# Altium PCB AX301_AX4010.PcbDoc (part 1 of 10)
Units mm, origin at the board's own origin, x right, y up, seen from the top; angles counter-clockwise.
Board outline 131.7 x 91.8 mm, 4 copper layers (Top Layer, GND, Mid-Layer 1, Bottom Layer); 191 components, 338 nets, 1108 pads, 420 vias.
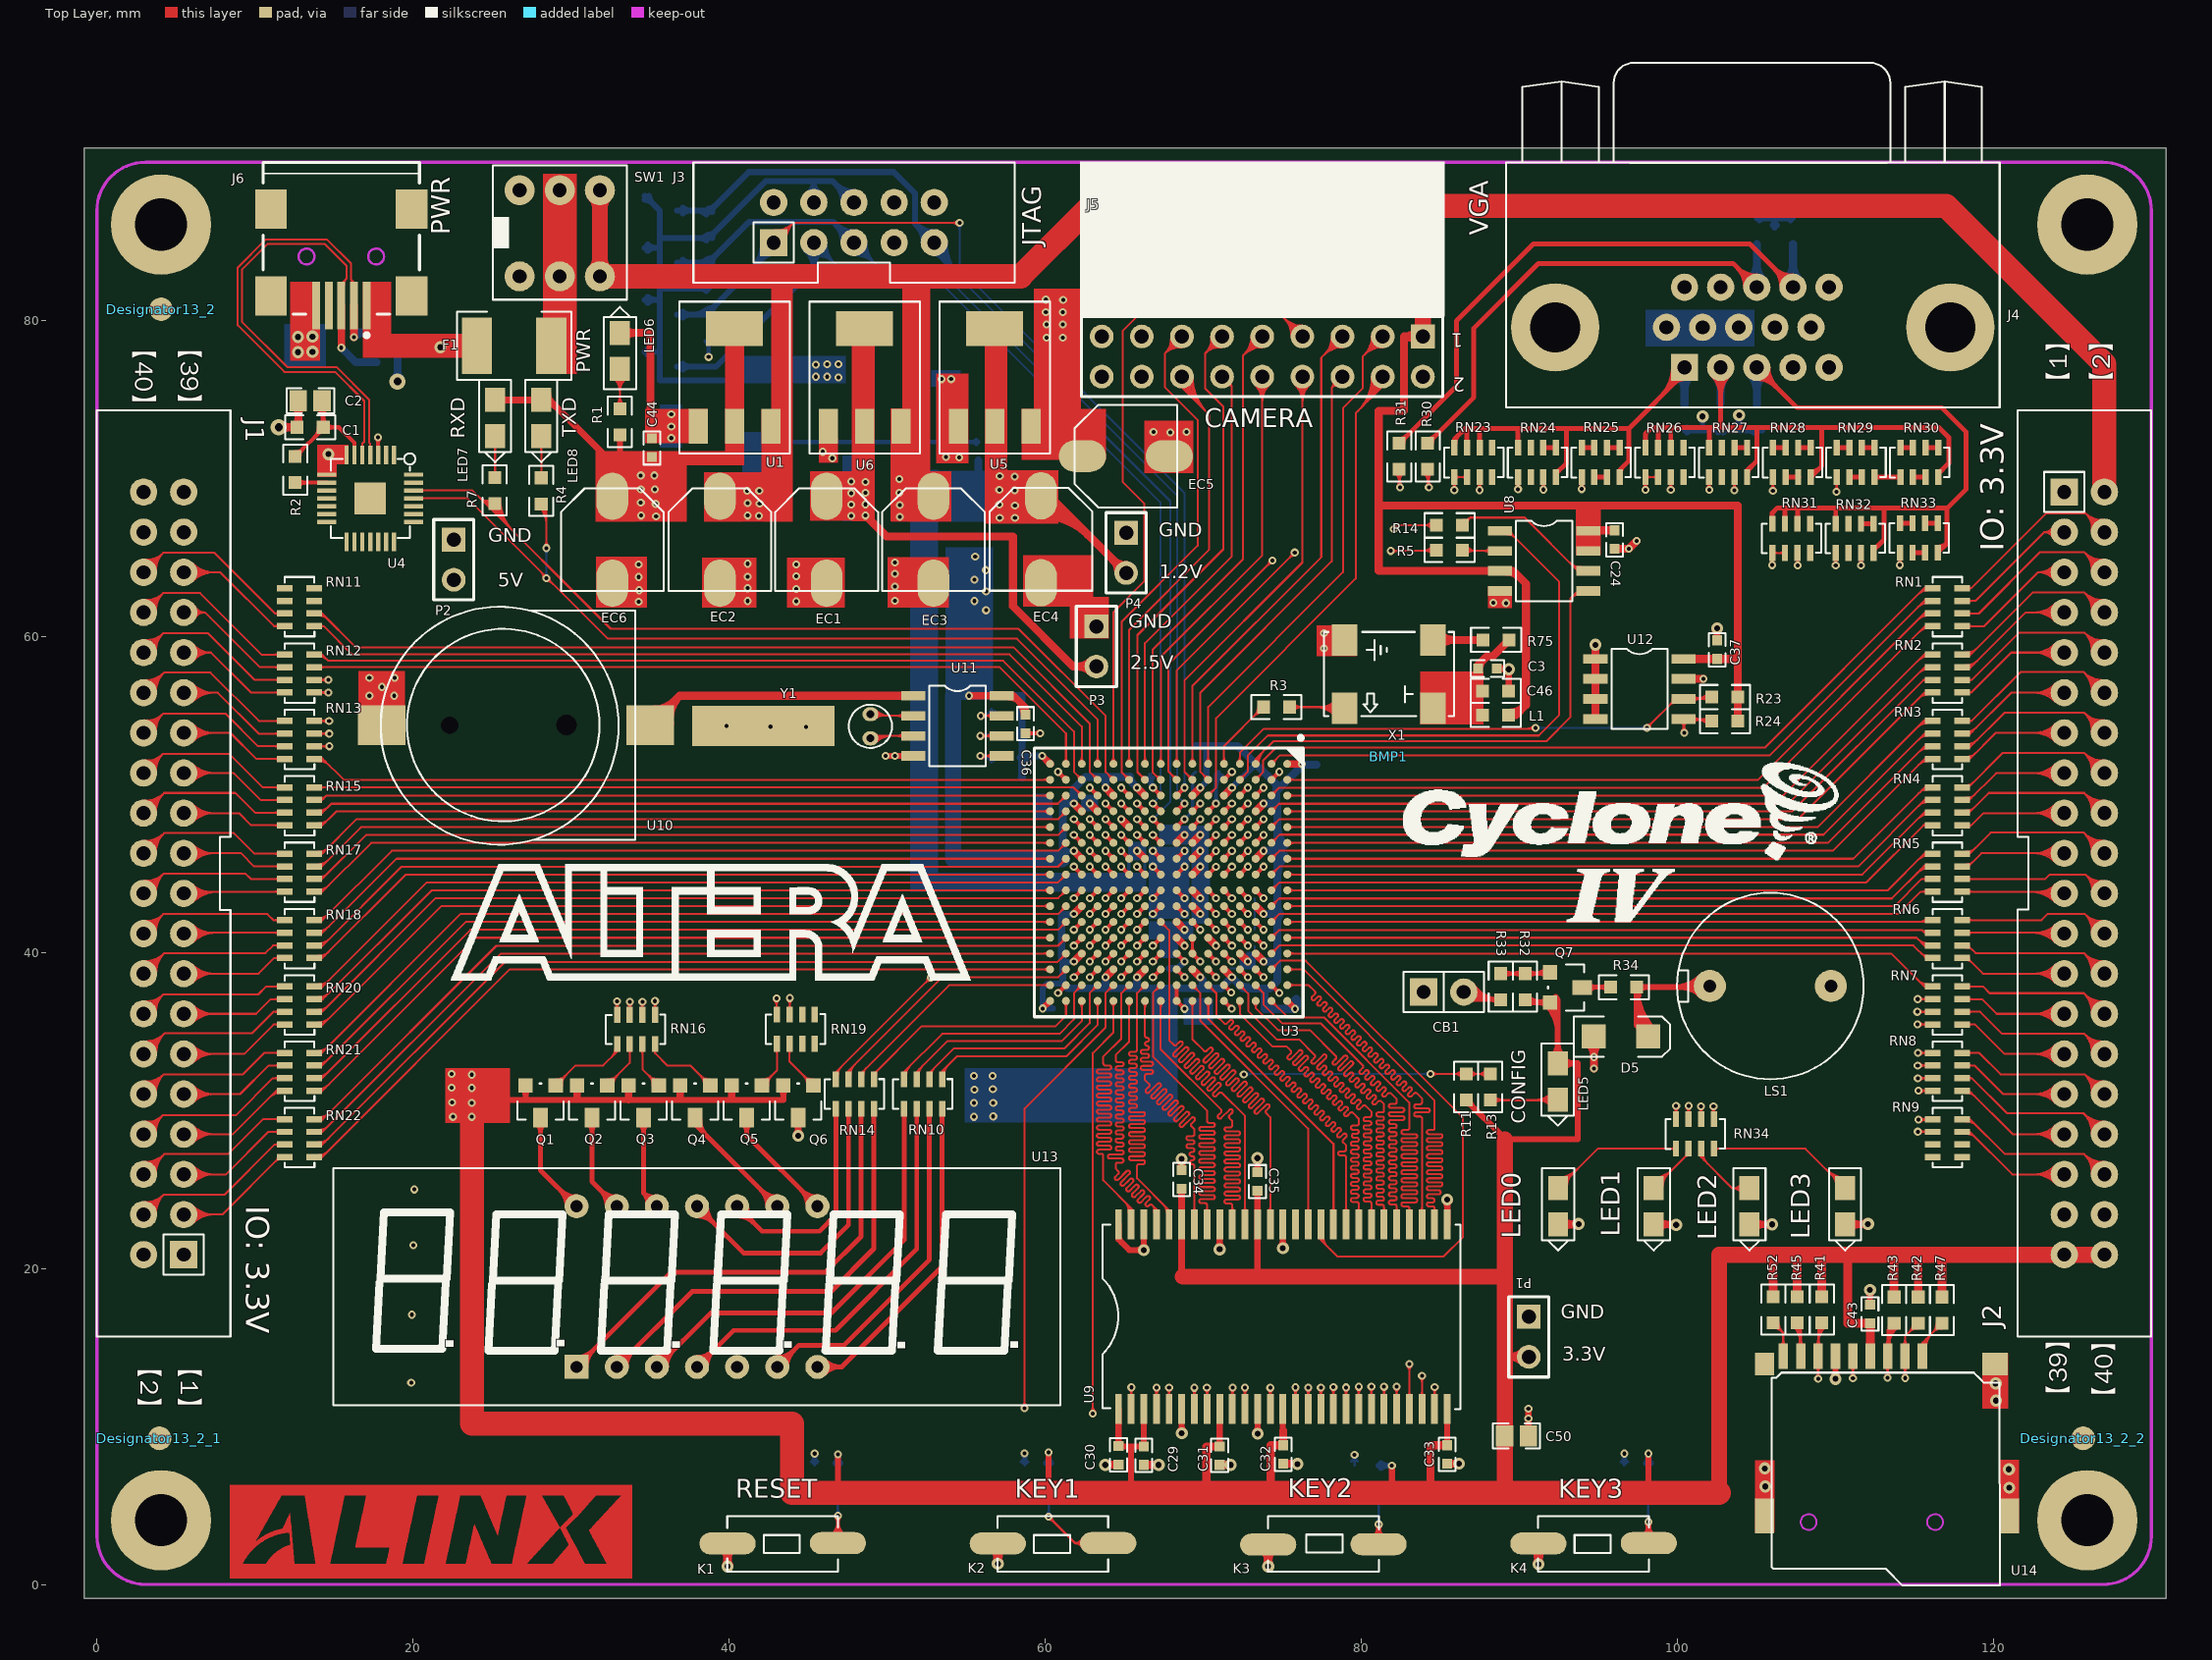
[diagram p0: Top Layer view]
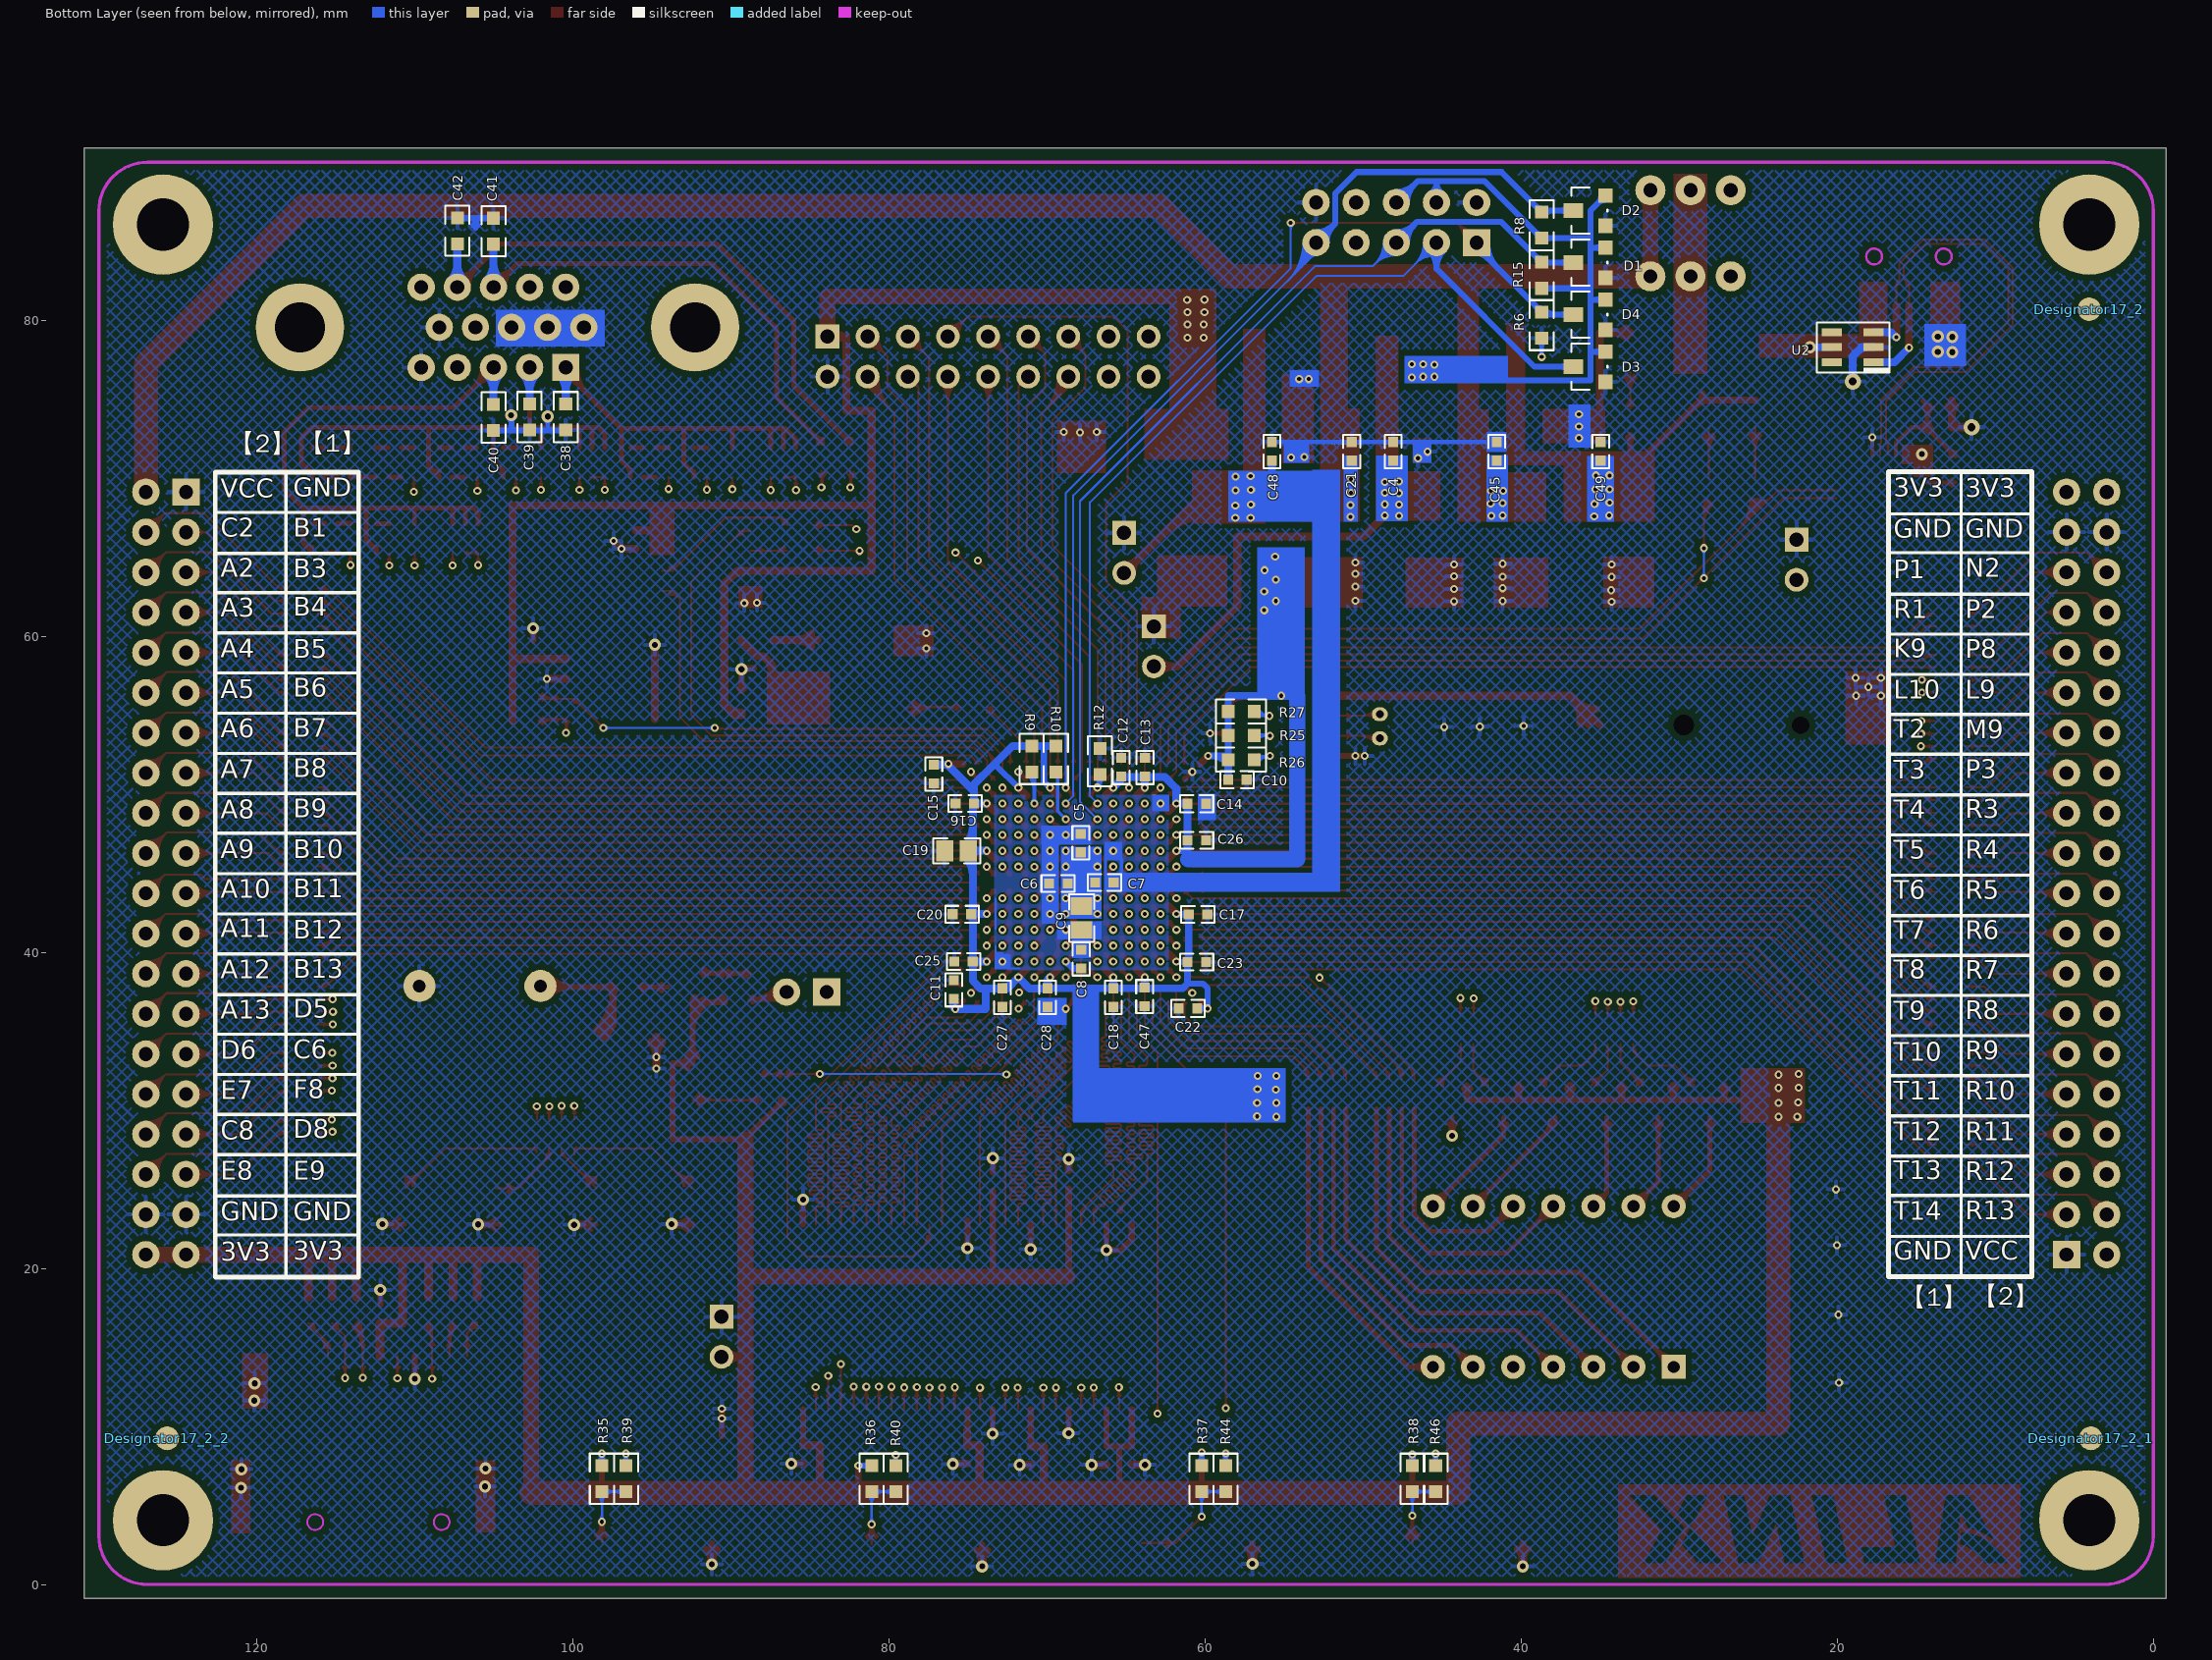
[diagram p1: Bottom Layer view, seen from below]
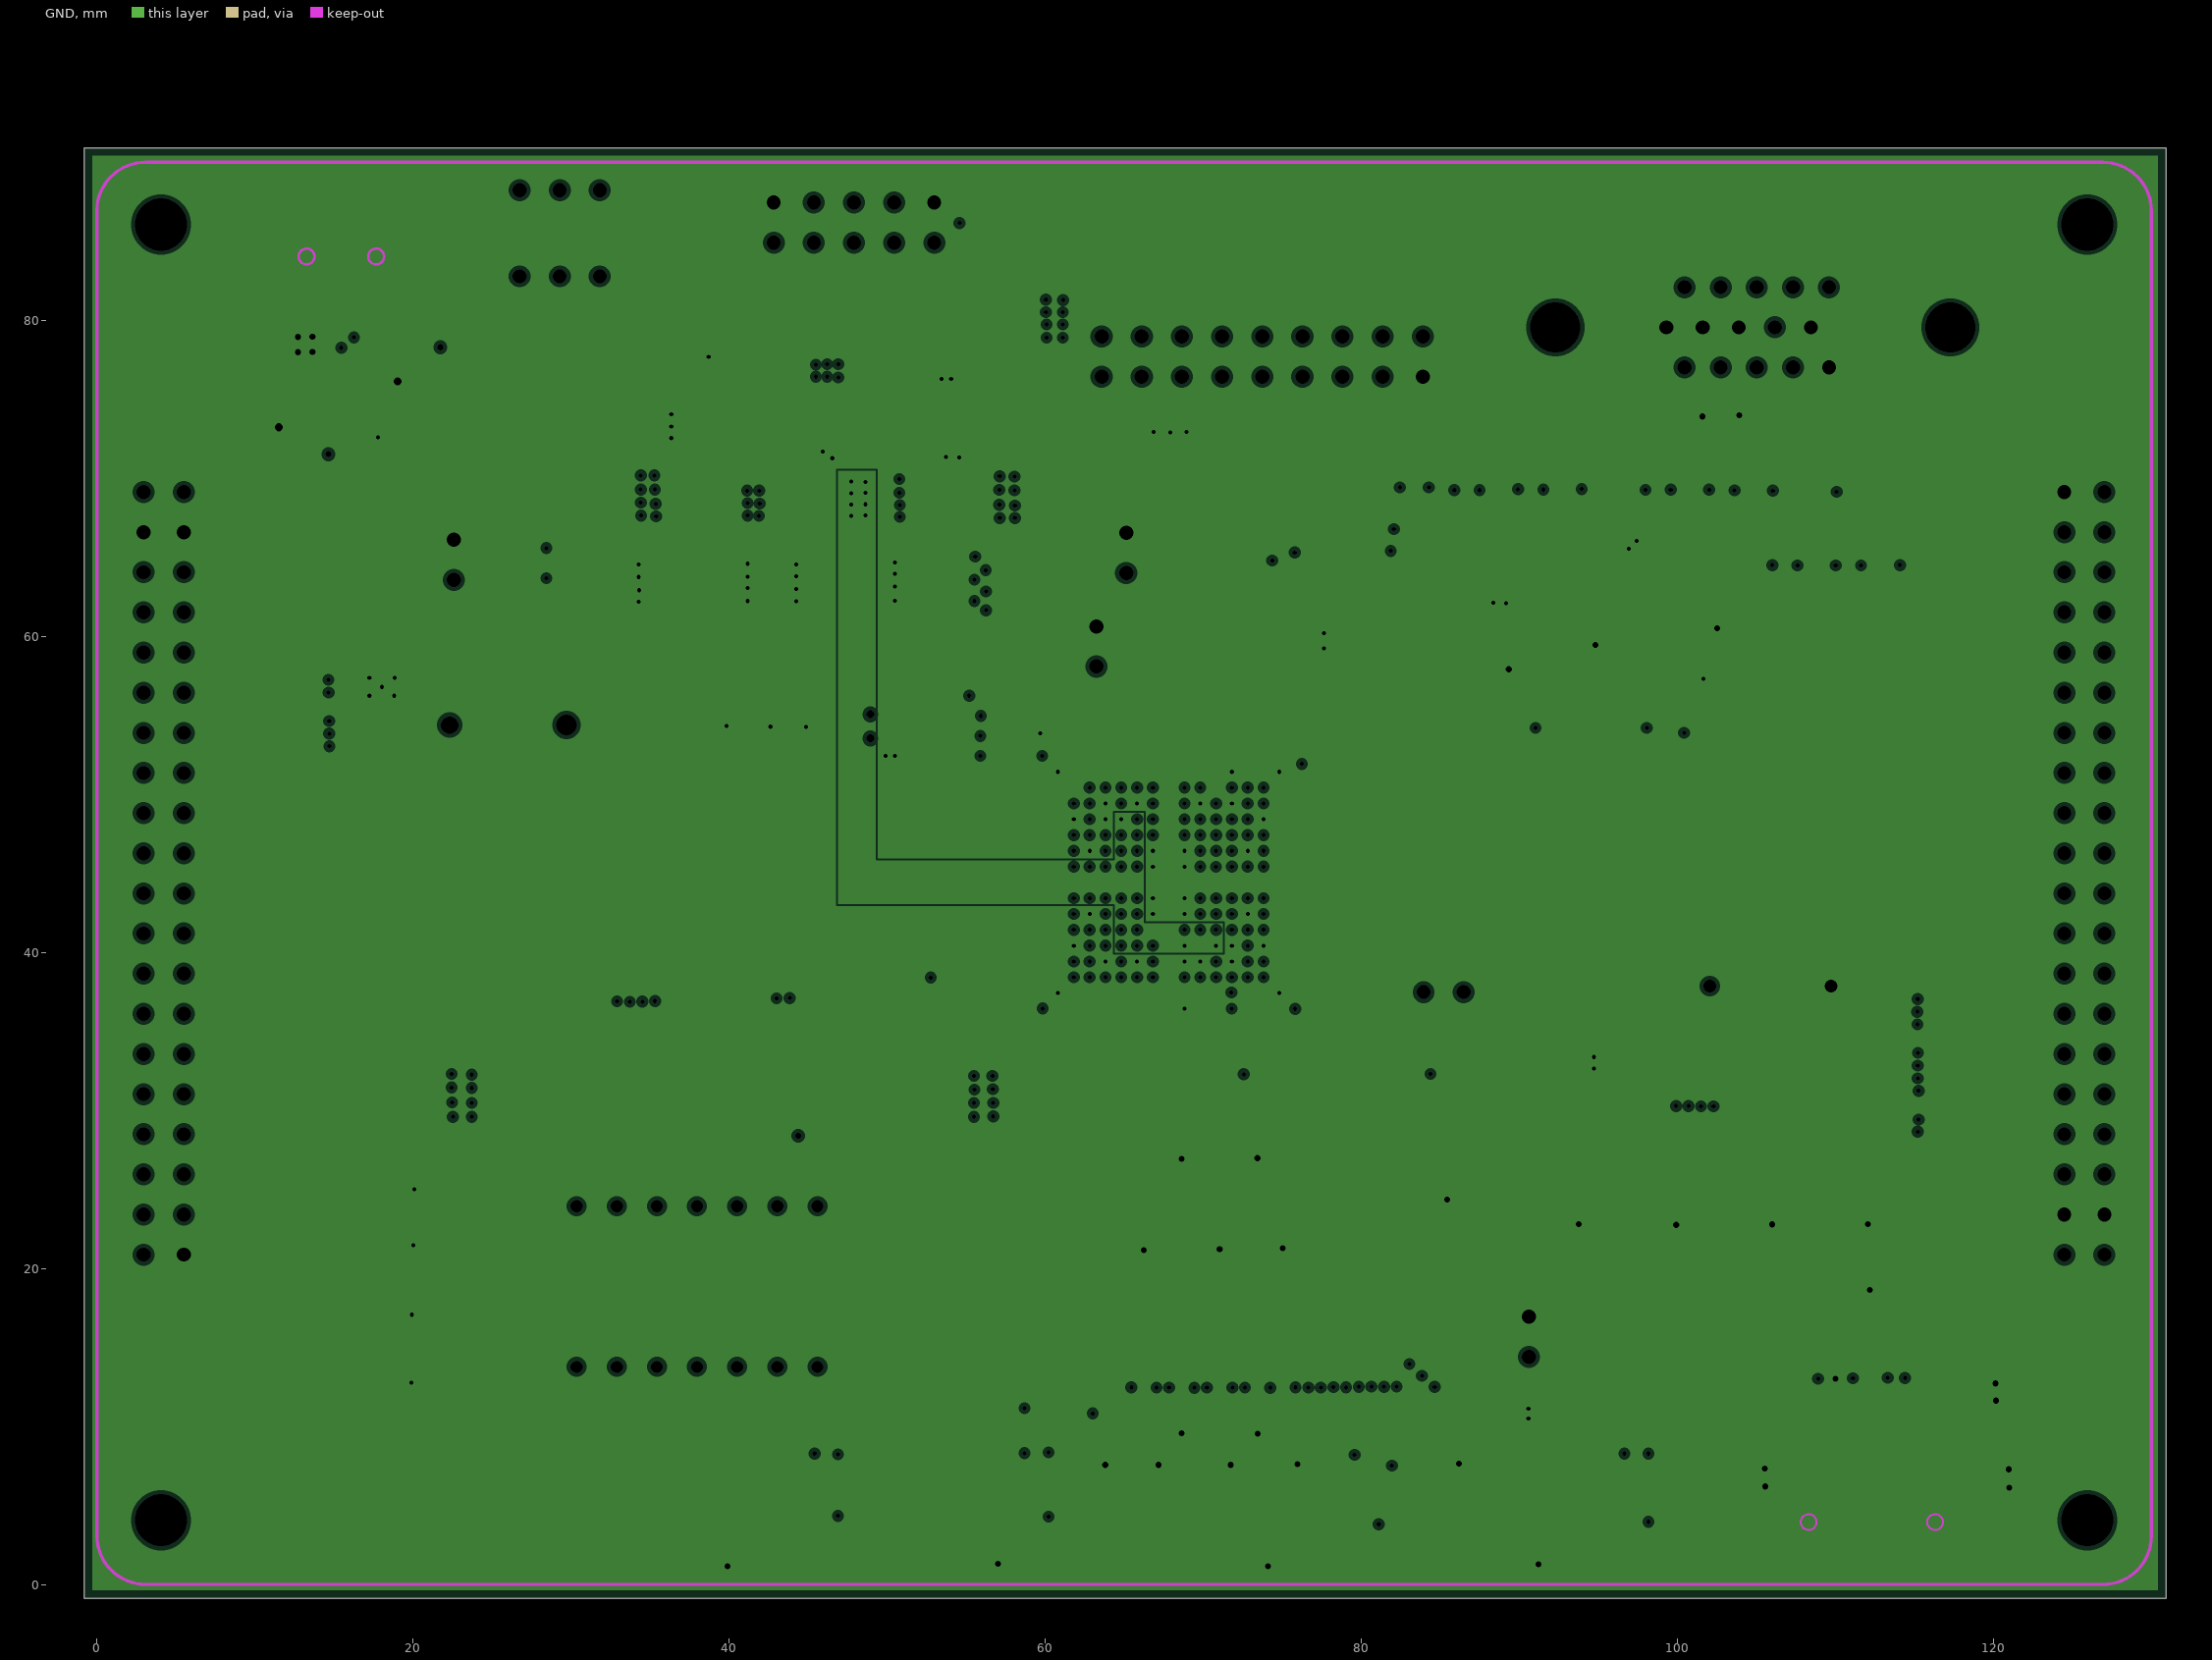
[diagram p2: GND, clearances drawn from the general rule]
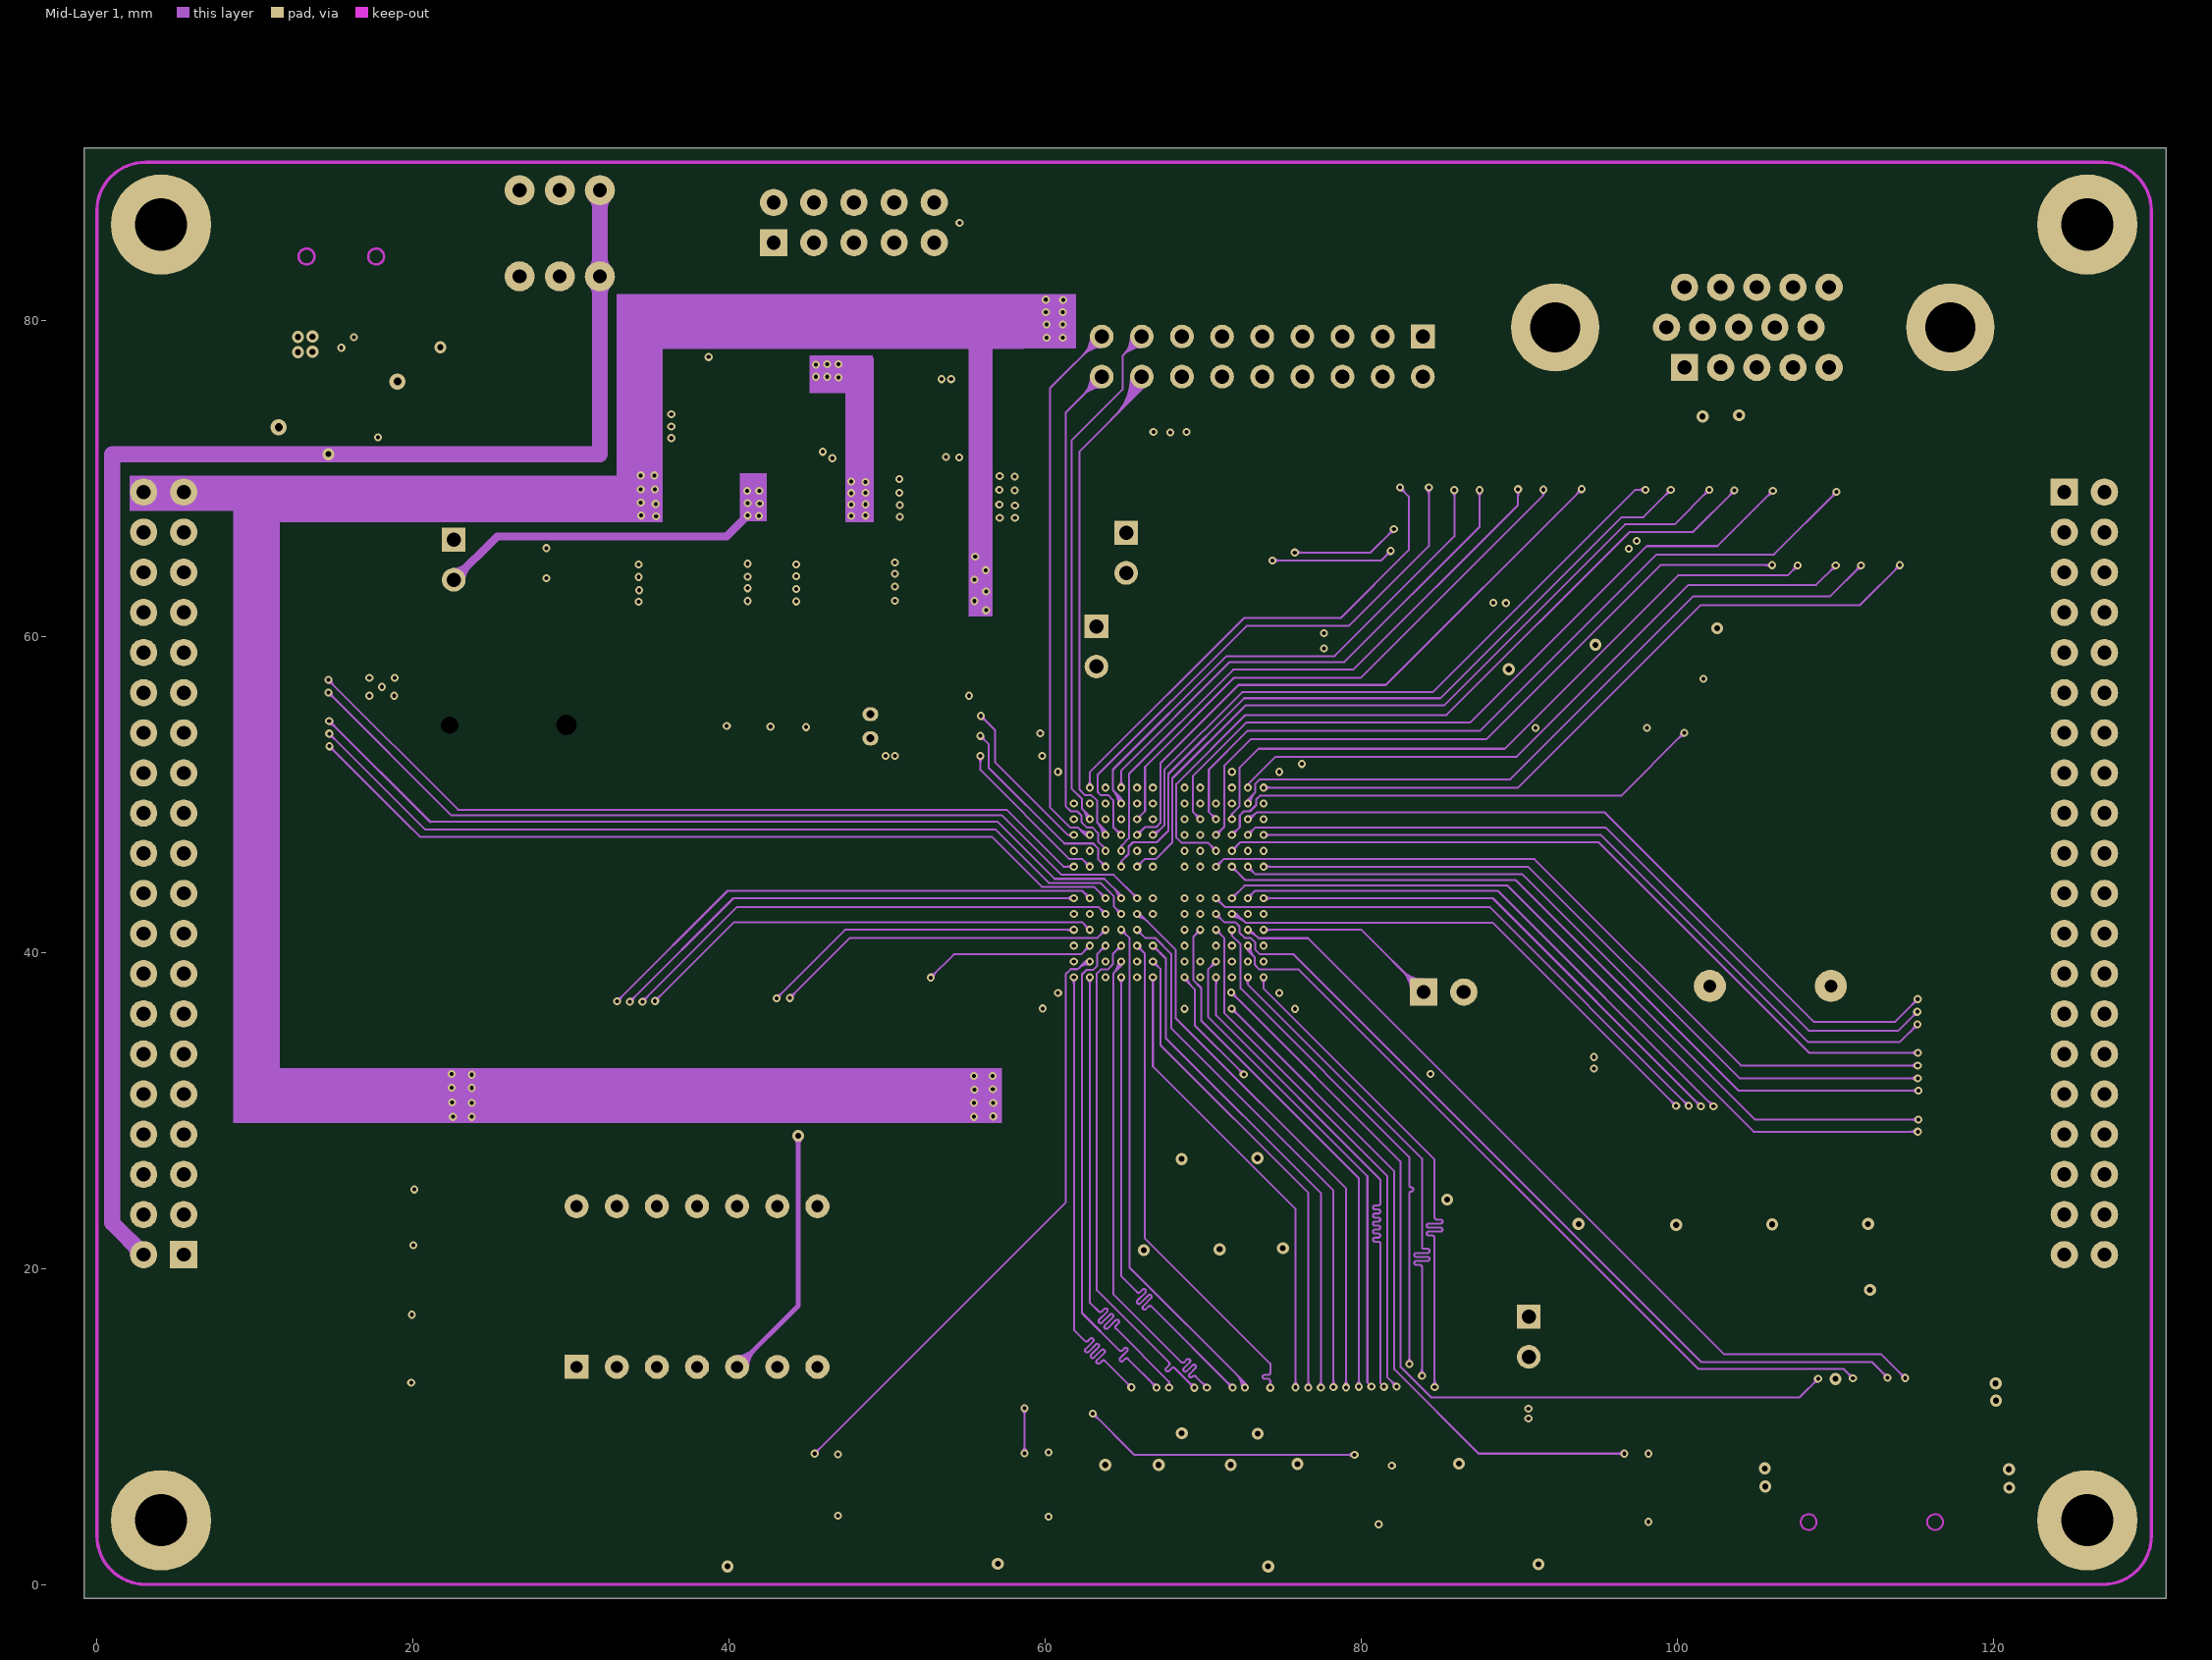
[diagram p3: Mid-Layer 1]

## Layer stack, top to bottom
Top Solder: solder mask 0.0102, Solder Resist, Dk 3.5
Top Layer: signal copper 0.0356
Dielectric1: core 0.32, FR-4, Dk 4.8
GND: plane copper 0.0356, net (Multiple Nets)
Dielectric3: prepreg 0.32, FR-4, Dk 4.8
Mid-Layer 1: signal copper 0.0356
Dielectric2: core 0.32, FR-4, Dk 4.8
Bottom Layer: signal copper 0.0356
Bottom Solder: solder mask 0.0102, Solder Resist, Dk 3.5

## Board outline
-0.787,90.914 130.912,90.914 130.912,82.354 130.912,-0.881 124.257,-0.881 -0.787,-0.881 -0.787,90.914

## Design rules (kind name [scope] priority, off if disabled: settings)
Clearance [All] p1: gap=0.127 ignorepadtopadclearanceinfootprint=FALSE except(0: Arc-Hole Track-Hole SMDPad-Hole THPad-Hole Via-Hole Fill-Hole Poly-Hole Region-Hole Text-Hole)
ComponentClearance [All] p1 off: gap=0.254 collisioncheckmode=3 verticalgap=0.254 showdistances=FALSE
FanoutControl [InNet('GND')] p1: bgadir=Out bgaviamode=Centered fanoutstyle=Auto fanoutdirection=Alternating viagrid=0.025
FanoutControl Fanout_BGA [IsBGA] p2: bgadir=Out bgaviamode=Centered fanoutstyle=Auto fanoutdirection=Alternating viagrid=0.025 // Fanout_BGA (Default Rule)
FanoutControl Fanout_LCC [IsLCC] p3: bgadir=Out bgaviamode=Centered fanoutstyle=Auto fanoutdirection=Alternating viagrid=0.025 // Fanout_LCC (Default Rule)
FanoutControl Fanout_SOIC [IsSOIC] p4: bgadir=Out bgaviamode=Centered fanoutstyle=Auto fanoutdirection=Alternating viagrid=0.025 // Fanout_SOIC (Default Rule)
FanoutControl Fanout_Small [(CompPinCount < 5)] p5: bgadir=Out bgaviamode=Centered fanoutstyle=Auto fanoutdirection=OutThenIn viagrid=0.025 // Fanout_Small (Default Rule)
FanoutControl Fanout_Default [All] p6: bgadir=Out bgaviamode=Centered fanoutstyle=Auto fanoutdirection=Alternating viagrid=0.025 // Fanout_Default (Default Rule)
HoleSize [All] p1: absolutevalues=TRUE maxlimit=5.08 minlimit=0.025 maxpercent=80.000 minpercent=20.000
HoleToHoleClearance [All] p1 off: gap=0.254 allowstackedmicrovias=TRUE
LayerPairs [All] p1 off: enforce=TRUE
MatchedLengths SDRAM_DB [InNetClass('S_DB[0..15]')] p1: tolerance=1.27 checknetsindiffpair=TRUE checkdiffpairvsdiffpair=FALSE checkxsignals=FALSE checkothers=FALSE
MatchedLengths SDRAM_A [InNetClass('S_A[0..12]')] p2: tolerance=1.27 checknetsindiffpair=TRUE checkdiffpairvsdiffpair=FALSE checkxsignals=FALSE checkothers=FALSE
MinimumSolderMaskSliver [All] p1 off: minsoldermaskwidth=0.254
NetAntennae [All] p1 off: netantennaetolerance=0
PlaneClearance [All] p1: clearance=0.254
PlaneConnect [All] p1: planeconnectstyle=Relief reliefexpansion=0.152 reliefentries=4 reliefconductorwidth=0.127 reliefairgap=0.152
PolygonConnect [All] p1: connectstyle=Relief reliefconductorwidth=0.254 reliefentries=4 polygonreliefangle="90 Angle" airgapwidth=0.254
RoutingVias [All] p1: holewidth=0.254 width=0.508 viastyle="Through Hole" minholewidth=0.254 minwidth=0.508 maxholewidth=1.27 maxwidth=2.54
SilkToSilkClearance [All] p1 off: silktosilkclearance=0.254
SilkToSolderMaskClearance SilkscreenOverComponentPads [IsPad] p1 off: minsilkscreentomaskgap=0.254 clearancetoexposedcopper=TRUE
SolderMaskExpansion [All] p1: expansion=0.102
Width D2V5 [InNet('D2V5')] p1: maxlimit=1.524 minlimit=0.203 preferedwidth=0.508
Width D1V2 [InNet('D1V2')] p2: maxlimit=1.524 minlimit=0.152 preferedwidth=0.508
Width D3V3 [InNet('D3V3')] p3: maxlimit=1.524 minlimit=0.152 preferedwidth=0.508
Width GND [InNet('GND')] p4 off: maxlimit=1.524 minlimit=0.254 preferedwidth=0.508
Width [All] p5 off: maxlimit=1.524 minlimit=0.127 preferedwidth=0.127
15 further rules are at their usual default settings.

## Classes and differential pairs
component class 2_FPGA: U3
net class VGAD[15..0]: VGAD0 VGAD1 VGAD2 VGAD3 VGAD4 VGAD5 VGAD6 VGAD7 VGAD8 VGAD9 VGAD10 VGAD11 VGAD12 VGAD13 VGAD14 VGAD15
net class SEL[0..5]: SEL0 SEL1 SEL2 SEL3 SEL4 SEL5
net class DIG[0..7]: DIG0 DIG1 DIG2 DIG3 DIG4 DIG5 DIG6 DIG7
component class 7_VGA: C38 C39 C40 C41 C42 C43 CB1 D5 J4 J5 K1 K2 K3 K4 LS1 Q7 R30 R31 R32 R33 R34 R35 R36 R37 R38 R39 R40 R41 R42 R43 R44 R45 R46 R47 R52 RN23 RN24 RN25 RN26 RN27 RN28 RN29 RN30 RN31 RN32 RN33 U14
component class 6_DIG: C36 C37 J2 LED0 LED1 LED2 LED3 Q1 Q2 Q3 Q4 Q5 Q6 R23 R24 R25 R26 R27 RN1 RN2 RN3 RN4 RN5 RN6 RN7 RN8 RN9 RN10 RN11 RN12 RN13 RN14 RN15 RN16 RN17 RN18 RN19 RN20 RN21 RN22 RN34 U10 U11 U12 U13 Y1
component class 4_FPGA: C3 C5 C6 C7 C8 C9 C10 C11 C12 C13 C14 C15 C16 C17 C18 C19 C20 C22 C23 C24 C25 C26 C27 C28 C46 C47 D1 D2 D3 D4 J3 L1 LED5 R3 R5 R6 R8 R9 R10 R11 R12 R13 R14 R15 R75 U8 X1
component class 5_SDRAM: C29 C30 C31 C32 C33 C34 C35 C50 U9
component class 1_POWER: C1 C2 C4 C21 C44 C45 C48 C49 EC1 EC2 EC3 EC4 EC5 EC6 F1 J6 LED6 LED7 LED8 P1 P2 P3 P4 R1 R2 R4 R7 SW1 U1 U2 U4 U5 U6
net class S_A[0..12]: S_A0 S_A1 S_A2 S_A3 S_A4 S_A5 S_A6 S_A7 S_A8 S_A9 S_A10 S_A11 S_A12
net class S_DB[0..15]: S_DB0 S_DB1 S_DB2 S_DB3 S_DB4 S_DB5 S_DB6 S_DB7 S_DB8 S_DB9 S_DB10 S_DB11 S_DB12 S_DB13 S_DB14 S_DB15

## Components (designator, comment, footprint, x,y, rotation, side; value= is the part's Value field where it differs from the comment)
BMP1 "" BMP1 81.712,52.375 r0 top
C1 "1uF" 0603 14.326,73.228 r180 top
C2 "10uF" 0805 14.249,74.905 r180 top
C3 "0.1uF" 0402 87.401,57.963 r0 top
C4 "104" 0402 48.108,71.12 r90 bottom
C5 "10uF" 0805 67.815,41.427 r90 bottom
C6 "104" 0402 65.786,44.425 r0 bottom
C7 "104" 0402 69.875,44.348 r180 bottom
C8 "104" 0402 67.843,40.157 r270 bottom
C9 "104" 0402 67.869,47.498 r270 bottom
C10 "104" 0402 58.547,50.927 r180 bottom
C11 "104" 0402 75.895,37.059 r90 bottom
C12 "104" 0402 65.303,51.13 r90 bottom
C13 "104" 0402 63.805,51.13 r90 bottom
C14 "104" 0402 61.112,49.403 r180 bottom
C15 "104" 0402 77.165,51.867 r270 bottom
C16 "104" 0402 74.625,49.428 r0 bottom
C17 "104" 0402 61.036,42.393 r180 bottom
C18 "104" 0402 65.811,37.719 r270 bottom
C19 "10uF" 0805 74.981,46.425 r0 bottom
C20 "104" 0402 74.803,42.41 r0 bottom
C21 "104" 0402 50.724,71.12 r90 bottom
C22 "104" 0402 60.503,36.449 r0 bottom
C23 "104" 0402 61.112,39.395 r180 bottom
C24 "104" 0402 96.037,65.532 r90 top
C25 "104" 0402 74.701,39.421 r0 bottom
C26 "104" 0402 61.112,47.092 r180 bottom
C27 "104" 0402 72.822,37.719 r270 bottom
C28 "104" 0402 69.977,37.719 r270 bottom
C29 "104" 0402 66.243,8.738 r270 top
C30 "104" 0402 64.643,8.763 r270 top
C31 "104" 0402 71.044,8.738 r270 top
C32 "104" 0402 75.057,8.814 r270 top
C33 "104" 0402 85.446,8.814 r270 top
C34 "104" 0402 68.631,25.044 r90 top
C35 "104" 0402 73.431,24.917 r90 top
C36 "104" 0402 58.75,55.042 r270 top
C37 "104" 0402 102.514,58.572 r90 top
C38 "5p1" 0603 100.457,74.701 r270 bottom
C39 "5p1" 0603 102.743,74.701 r270 bottom
C40 "5p1" 0603 105.029,74.676 r270 bottom
C41 "5p1" 0603 105.029,84.811 r90 bottom
C42 "5p1" 0603 107.315,84.836 r90 bottom
C43 "104" 0402 112.192,16.535 r90 top
C44 "104" 0402 35.128,71.349 r90 top
C45 "104" 0402 41.554,71.12 r90 bottom
C46 "4.7uF" 0603 87.681,56.54 r0 top
C47 "104" 0402 63.83,37.77 r270 bottom
C48 "104" 0402 55.778,71.12 r90 bottom
C49 "104" 0402 34.976,71.12 r90 bottom
C50 "10uF" 0805 89.078,9.398 r0 top
CB1 "BUZ" SIP2 83.947,37.49 r0 top
D1 "BAT54S" SOT23 34.671,82.685 r90 bottom
D2 "BAT54S" SOT23 34.671,85.979 r90 bottom
D3 "BAT54S" SOT23 34.671,76.098 r90 bottom
D4 "BAT54S" SOT23 34.671,79.392 r90 bottom
D5 "4148" 1206A 94.717,34.671 r0 top
Designator13_2 "Comment" TPS 4.064,80.696 r0 top
Designator13_2_1 "Comment" TPS 3.962,9.246 r0 top
Designator13_2_2 "Comment" TPS 125.679,9.246 r0 top
Designator17_2 "Comment" TPS 4.064,80.696 r180 bottom
Designator17_2_1 "Comment" TPS 3.962,9.246 r180 bottom
Designator17_2_2 "Comment" TPS 125.679,9.246 r180 bottom
EC1 "100uF/16V" AEC6.5 46.177,68.859 r270 top
EC2 "100uF/16V" AEC6.5 39.421,68.859 r270 top
EC3 "100uF/16V" AEC6.5 52.934,68.859 r270 top
EC4 "100uF/16V" AEC6.5 59.741,68.885 r270 top
EC5 "100uF/16V" AEC6.5 62.357,71.399 r0 top
EC6 "100uF/16V" AEC6.5 32.614,68.859 r270 top
F1 "Fuse" 1812 24.054,78.384 r0 top
J1 "IDC40" IDC-40J 4.225,45 r90 top (schematic designator J6)
J2 "IDC40" IDC-40J 125.755,45 r270 top
J3 "JTAG" JTAG-10 42.824,84.912 r0 top
J4 "VGA" VGA 100.457,77.013 r90 top
J5 "Header 9X2" HDR2X9 83.896,78.973 r180 top locked
J6 "EC2" MINIUSBB 15.469,80.932 r270 top (schematic designator J1)
K1 "RESET" KEY735SO 46.888,2.616 r180 top
K2 "KEY1" KEY735SO 63.991,2.616 r180 top
K3 "KEY2" KEY735SO 74.109,2.52 r0 top
K4 "KEY3" KEY735SO 98.196,2.616 r180 top
L1 "Bead" 0603 89.332,55.016 r180 top
LED0 "LED0" LEDSO 92.456,22.784 r90 top
LED1 "LED1" LEDso 98.51,22.784 r90 top
LED2 "LED2" LEDSO 104.563,22.784 r90 top
LED3 "LED3" LEDSO 110.617,22.784 r90 top
LED5 "CONFIG" LEDSO 92.431,30.683 r90 top
LED6 "D3V3" LEDSO 33.096,79.197 r270 top
LED7 "RXD" LEDSO 25.197,72.669 r90 top
LED8 "TXD" LEDSO 28.118,72.669 r90 top
LS1 "BUZZER" BUZZER 102.057,37.871 r0 top
P1 "3.3V" HDR1X2 90.602,16.942 r270 top
P2 "5V" HDR1X2 22.581,66.116 r270 top
P3 "3.3V" HDR1X2 63.246,60.63 r270 top
P4 "1.2V" HDR1X2 65.126,66.548 r270 top
Q1 "9012" SOT23 29.032,31.572 r180 top
Q2 "9012" SOT23 32.294,31.572 r180 top
Q3 "9012" SOT23 35.555,31.572 r180 top
Q4 "9012" SOT23 38.816,31.572 r180 top
Q5 "9012" SOT23 42.078,31.572 r180 top
Q6 "9012" SOT23 45.339,31.572 r180 top
Q7 "9012" SOT23 91.948,38.735 r270 top
R1 "1K" 0603 33.096,72.746 r90 top
R2 "10k" 0603 12.548,69.723 r90 top
R3 "33R" 0603 73.812,55.524 r0 top
R4 "1K" 0603 28.118,68.377 r90 top
R5 "49.9" 0603 84.76,65.456 r0 top
R6 "1K" 0603 38.71,78.867 r90 bottom
R7 "1K" 0603 25.171,68.402 r90 top
R8 "10K" 0603 38.71,85.192 r90 bottom
R9 "10K" 0603 70.968,53.061 r270 bottom
R10 "10K" 0603 69.444,53.061 r270 bottom
R11 "10K" 0603 86.639,30.658 r90 top
R12 "10K" 0603 66.65,51.257 r90 bottom
R13 "10K" 0603 88.163,32.309 r270 top
R14 "24.9" 0603 84.76,67.031 r0 top
R15 "10K" 0603 38.71,82.017 r90 bottom
R23 "4k7" 0603 103.835,56.159 r180 top
R24 "4k7" 0603 103.835,54.635 r180 top
R25 "10k" 0603 58.547,53.721 r180 bottom
R26 "10k" 0603 58.547,52.197 r180 bottom
R27 "10k" 0603 58.547,55.245 r180 bottom
R30 "22" 0603 84.201,72.212 r270 top
R31 "22" 0603 82.398,72.212 r270 top
R32 "1K" 0603 90.373,37.008 r90 top
R33 "2K2" 0603 88.824,37.008 r90 top
R34 "15" 0603 95.783,37.795 r0 top
R35 "10k" 0603 98.171,7.518 r270 bottom
R36 "10k" 0603 81.102,7.518 r270 bottom
R37 "10k" 0603 60.223,7.518 r270 bottom
R38 "10k" 0603 46.888,7.518 r270 bottom
R39 "100" 0603 96.647,7.518 r270 bottom
R40 "100" 0603 79.578,7.518 r270 bottom
R41 "1K" 0603 109.144,18.212 r270 top
R42 "1K" 0603 115.24,18.186 r270 top
R43 "1K" 0603 113.716,18.186 r270 top
R44 "100" 0603 58.699,7.518 r270 bottom
R45 "1K" 0603 107.594,18.212 r270 top
R46 "100" 0603 45.415,7.518 r270 bottom
R47 "1K" 0603 116.738,18.186 r270 top
R52 "1K" 0603 106.07,18.212 r270 top
R75 "10k" 0603 87.706,59.766 r0 top
RN1 "33R" RN-8P 116.154,63.043 r0 top
RN2 "33R" RN-8P 116.154,58.842 r0 top
RN3 "33R" RN-8P 116.154,54.642 r0 top
RN4 "33R" RN-8P 116.154,50.441 r0 top
RN5 "33R" RN-8P 116.154,46.241 r0 top
RN6 "33R" RN-8P 116.154,42.04 r0 top
RN7 "33R" RN-8P 116.154,37.84 r0 top
RN8 "33R" RN-8P 116.154,33.639 r0 top
RN9 "33R" RN-8P 116.154,29.439 r0 top
RN10 "470" RN-8P 51.079,30.099 r90 top
RN11 "33R" RN-8P 11.887,63.043 r0 top
RN12 "33R" RN-8P 11.887,58.842 r0 top
RN13 "33R" RN-8P 11.887,54.642 r0 top
RN14 "470" RN-8P 46.761,30.099 r90 top
RN15 "33R" RN-8P 11.887,50.441 r0 top
RN16 "470" RN-8P 32.918,34.188 r90 top
RN17 "33R" RN-8P 11.887,46.241 r0 top
RN18 "33R" RN-8P 11.887,42.04 r0 top
RN19 "470" RN-8P 43.028,34.214 r90 top
RN20 "33R" RN-8P 11.887,37.84 r0 top
RN21 "33R" RN-8P 11.887,33.639 r0 top
RN22 "33R" RN-8P 11.887,29.439 r0 top
RN23 "1K" RN-8P 88.29,71.933 r270 top
RN24 "2K" RN-8P 92.322,71.933 r270 top
RN25 "2K" RN-8P 96.353,71.933 r270 top
RN26 "1K" RN-8P 100.384,71.933 r270 top
RN27 "2K" RN-8P 104.416,71.933 r270 top
RN28 "2K" RN-8P 108.447,71.933 r270 top
RN29 "2K" RN-8P 112.478,71.933 r270 top
RN30 "2K" RN-8P 116.51,71.933 r270 top
RN31 "1K" RN-8P 108.407,67.132 r270 top
RN32 "2K" RN-8P 112.42,67.132 r270 top
RN33 "2K" RN-8P 116.484,67.158 r270 top
RN34 "470" RN-8P 102.311,29.439 r270 top
SW1 "SW" KEY_DPDT 26.746,82.779 r90 top
U1 "1117-3.3" SOT223 38.049,73.279 r0 top
U2 "SRV05-4" SOT23-6 17.704,77.343 r90 bottom
U3 "EP4CE6F17C8" FBGA256 67.818,44.425 r270 top locked
U4 "CP2102" QFN28 18.796,71.476 r270 top
U5 "1117-1.2" SOT223 54.508,73.279 r0 top
U6 "1117-2.5" SOT223 46.279,73.279 r0 top
U8 "M25P16-VMN3PB" SO8 88.773,66.675 r0 top
U9 "HY57V2562GTR" TSOP-54 64.643,11.1 r180 top
U10 "battery" BATSO 36.017,54.381 r0 top
U11 "DS1302" SO8 51.664,56.236 r0 top
U12 "24LC04" SO8 94.818,58.572 r0 top
U13 "HEX6" NIX_6 30.353,13.767 r0 top locked
U14 "SD" TF 113.259,9.398 r90 top locked
X1 "50M" CY_4 84.531,55.448 r0 top
Y1 "32.768kHz" CY_SMALL 48.946,55.067 r270 top

## Footprints (in the part's own frame and the unit in brackets; to place one, negate y for a bottom-side part, rotate by r counter-clockwise, add the part's x,y. Pads: shape width x height; smd on the part's side, far side on the other; paste and mask are expansions set on the pad)
0402 [mm]
  rect 0.635x0.635 smd: 1(0,0) 2(1.175,0)
  silkscreen extent -0.48,-0.53 1.63,0.53, body extent -0.42,-0.42 1.59,0.42, height 4.57
0603 [mil]
  rect 32x32 smd: 1(0,0) 2(65,0)
  silkscreen extent -30,-30 95,30, body extent -20,-20 85,20, height 180
0805 [mm]
  rect 1.1x1.36 smd: 1(0,0) 2(1.5,0)
  silkscreen extent -0.76,-0.79 2.24,0.79
1206A [mil]
  rect 60x60 smd: 1(0,0) 2(135,0)
  silkscreen extent -50,-50 190,50
1812 [mil]
  rect 75x140 smd: 1(0,0) 2(185,0)
  silkscreen extent -50,-85 235,85
AEC6.5 [mm]
  oval 3x2 smd: 1(0,0) 2(5.5,0)
  silkscreen extent -0.5,-3.25 6,3.25
BATSO [mm]
  round 1 hole 1.1: 0(-13.7,0)
  round 1 hole 1.3: 0(-6.3,0)
  rect 3x2.5 smd: 1(-1,0) 2(-18,0)
  silkscreen extent -18.06,-7.57 -1.95,7.48, body extent -18.12,-7.63 -1.89,7.55, height 4.57
BMP1 [mm]
  silkscreen extent 0.97,-10.41 28.5,-0.36
BUZZER [mil]
  round 80 hole 32: 1(0,0) 2(301.57,0)
  silkscreen extent -81,-232 383,232, body extent -82,-232 383,232, height 394
CY_4 [mm]
  rect 1.6x2 smd: 1(0,4.318) 2(-5.588,4.318) 3(-5.588,0) 4(0,0)
  silkscreen extent -6.88,-0.51 1.35,4.83
CY_SMALL [mil]
  rect 100x354.33 smd: 0(29,-267)
  oval 35x40 hole 20: 1(0,0) 2(60,0)
  silkscreen extent -24,-54 84,54, body extent -26,-56 86,56, height 180
FBGA256 [mm] "BGA, 256-Leads, Body 17x17mm, Pitch 1mm"
  round 0.5 smd: A1(-7.5,7.5) A2(-6.5,7.5) A3(-5.5,7.5) A4(-4.5,7.5) A5(-3.5,7.5) A6(-2.5,7.5) A7(-1.5,7.5) A8(-0.5,7.5) A9(0.5,7.5) A10(1.5,7.5) A11(2.5,7.5) A12(3.5,7.5) A13(4.5,7.5) A14(5.5,7.5) A15(6.5,7.5) A16(7.5,7.5) B1(-7.5,6.5) B2(-6.5,6.5) B3(-5.5,6.5) B4(-4.5,6.5) B5(-3.5,6.5) B6(-2.5,6.5) B7(-1.5,6.5) B8(-0.5,6.5) B9(0.5,6.5) B10(1.5,6.5) B11(2.5,6.5) B12(3.5,6.5) B13(4.5,6.5) B14(5.5,6.5) B15(6.5,6.5) B16(7.5,6.5) C1(-7.5,5.5) C2(-6.5,5.5) C3(-5.5,5.5) C4(-4.5,5.5) C5(-3.5,5.5) C6(-2.5,5.5) C7(-1.5,5.5) C8(-0.5,5.5) C9(0.5,5.5) C10(1.5,5.5) C11(2.5,5.5) C12(3.5,5.5) C13(4.5,5.5) C14(5.5,5.5) C15(6.5,5.5) C16(7.5,5.5) D1(-7.5,4.5) D2(-6.5,4.5) D3(-5.5,4.5) D4(-4.5,4.5) D5(-3.5,4.5) D6(-2.5,4.5) D7(-1.5,4.5) D8(-0.5,4.5) D9(0.5,4.5) D10(1.5,4.5) D11(2.5,4.5) D12(3.5,4.5) D13(4.5,4.5) D14(5.5,4.5) D15(6.5,4.5) D16(7.5,4.5) E1(-7.5,3.5) E2(-6.5,3.5) E3(-5.5,3.5) E4(-4.5,3.5) E5(-3.5,3.5) E6(-2.5,3.5) E7(-1.5,3.5) E8(-0.5,3.5) E9(0.5,3.5) E10(1.5,3.5) E11(2.5,3.5) E12(3.5,3.5) E13(4.5,3.5) E14(5.5,3.5) E15(6.5,3.5) E16(7.5,3.5) F1(-7.5,2.5) F2(-6.5,2.5) F3(-5.5,2.5) F4(-4.5,2.5) F5(-3.5,2.5) F6(-2.5,2.5) F7(-1.5,2.5) F8(-0.5,2.5) F9(0.5,2.5) F10(1.5,2.5) F11(2.5,2.5) F12(3.5,2.5) F13(4.5,2.5) F14(5.5,2.5) F15(6.5,2.5) F16(7.5,2.5) G1(-7.5,1.5) G2(-6.5,1.5) G3(-5.5,1.5) G4(-4.5,1.5) G5(-3.5,1.5) G6(-2.5,1.5) G7(-1.5,1.5) G8(-0.5,1.5) G9(0.5,1.5) G10(1.5,1.5) G11(2.5,1.5) G12(3.5,1.5) G13(4.5,1.5) G14(5.5,1.5) G15(6.5,1.5) G16(7.5,1.5) H1(-7.5,0.5) H2(-6.5,0.5) H3(-5.5,0.5) H4(-4.5,0.5) H5(-3.5,0.5) H6(-2.5,0.5) H7(-1.5,0.5) H8(-0.5,0.5) H9(0.5,0.5) H10(1.5,0.5) H11(2.5,0.5) H12(3.5,0.5) H13(4.5,0.5) H14(5.5,0.5) H15(6.5,0.5) H16(7.5,0.5) J1(-7.5,-0.5) J2(-6.5,-0.5) J3(-5.5,-0.5) J4(-4.5,-0.5) J5(-3.5,-0.5) J6(-2.5,-0.5) J7(-1.5,-0.5) J8(-0.5,-0.5) J9(0.5,-0.5) J10(1.5,-0.5) J11(2.5,-0.5) J12(3.5,-0.5) J13(4.5,-0.5) J14(5.5,-0.5) J15(6.5,-0.5) J16(7.5,-0.5) K1(-7.5,-1.5) K2(-6.5,-1.5) K3(-5.5,-1.5) K4(-4.5,-1.5) K5(-3.5,-1.5) K6(-2.5,-1.5) K7(-1.5,-1.5) K8(-0.5,-1.5) K9(0.5,-1.5) K10(1.5,-1.5) K11(2.5,-1.5) K12(3.5,-1.5) K13(4.5,-1.5) K14(5.5,-1.5) K15(6.5,-1.5) K16(7.5,-1.5) L1(-7.5,-2.5) L2(-6.5,-2.5) L3(-5.5,-2.5) L4(-4.5,-2.5) L5(-3.5,-2.5) L6(-2.5,-2.5) L7(-1.5,-2.5) L8(-0.5,-2.5) L9(0.5,-2.5) L10(1.5,-2.5) L11(2.5,-2.5) L12(3.5,-2.5) L13(4.5,-2.5) L14(5.5,-2.5) L15(6.5,-2.5) L16(7.5,-2.5) M1(-7.5,-3.5) M2(-6.5,-3.5) M3(-5.5,-3.5) M4(-4.5,-3.5) M5(-3.5,-3.5) M6(-2.5,-3.5) M7(-1.5,-3.5) M8(-0.5,-3.5) M9(0.5,-3.5) M10(1.5,-3.5) M11(2.5,-3.5) M12(3.5,-3.5) M13(4.5,-3.5) M14(5.5,-3.5) M15(6.5,-3.5) M16(7.5,-3.5) N1(-7.5,-4.5) N2(-6.5,-4.5) N3(-5.5,-4.5) N4(-4.5,-4.5) N5(-3.5,-4.5) N6(-2.5,-4.5) N7(-1.5,-4.5) N8(-0.5,-4.5) N9(0.5,-4.5) N10(1.5,-4.5) N11(2.5,-4.5) N12(3.5,-4.5) N13(4.5,-4.5) N14(5.5,-4.5) N15(6.5,-4.5) N16(7.5,-4.5) P1(-7.5,-5.5) P2(-6.5,-5.5) P3(-5.5,-5.5) P4(-4.5,-5.5) P5(-3.5,-5.5) P6(-2.5,-5.5) P7(-1.5,-5.5) P8(-0.5,-5.5) P9(0.5,-5.5) P10(1.5,-5.5) P11(2.5,-5.5) P12(3.5,-5.5) P13(4.5,-5.5) P14(5.5,-5.5) P15(6.5,-5.5) P16(7.5,-5.5) R1(-7.5,-6.5) R2(-6.5,-6.5) R3(-5.5,-6.5) R4(-4.5,-6.5) R5(-3.5,-6.5) R6(-2.5,-6.5) R7(-1.5,-6.5) R8(-0.5,-6.5) R9(0.5,-6.5) R10(1.5,-6.5) R11(2.5,-6.5) R12(3.5,-6.5) R13(4.5,-6.5) R14(5.5,-6.5) R15(6.5,-6.5) R16(7.5,-6.5) T1(-7.5,-7.5) T2(-6.5,-7.5) T3(-5.5,-7.5) T4(-4.5,-7.5) T5(-3.5,-7.5) T6(-2.5,-7.5) T7(-1.5,-7.5) T8(-0.5,-7.5) T9(0.5,-7.5) T10(1.5,-7.5) T11(2.5,-7.5) T12(3.5,-7.5) T13(4.5,-7.5) T14(5.5,-7.5) T15(6.5,-7.5) T16(7.5,-7.5)
  silkscreen extent -9.27,-8.5 8.5,8.5, body extent -8.5,-8.5 8.5,8.5, height 2.2
HDR1X2 [mm] "Connector; Header; 2 Position"
  rect 1.5x1.5 hole 0.9: 1(0,0)
  round 1.5 hole 0.9: 2(2.54,0)
  silkscreen extent -1.27,-1.27 3.81,1.27, body extent -0.85,-0.85 3.39,0.85, height 4.57
HDR2X9 [mm] "Connector; Header; 9x2 Position"
  rect 1.5x1.5 hole 0.9: 1(0,0)
  round 1.5 hole 0.9: 2(0,2.54) 3(2.54,0) 4(2.54,2.54) 5(5.08,0) 6(5.08,2.54) 7(7.62,0) 8(7.62,2.54) 9(10.16,0) 10(10.16,2.54) 11(12.7,0) 12(12.7,2.54) 13(15.24,0) 14(15.24,2.54) 15(17.78,0) 16(17.78,2.54) 17(20.32,0) 18(20.32,2.54)
  silkscreen extent -1.27,-1.27 21.59,3.81
IDC-40J [mil]
  rect 68x68 hole 35: 1(-950,-50)
  round 68 hole 35: 2(-950,50) 3(-850,-50) 4(-850,50) 5(-750,-50) 6(-750,50) 7(-650,-50) 8(-650,50) 9(-550,-50) 10(-550,50) 11(-450,-50) 12(-450,50) 13(-350,-50) 14(-350,50) 15(-250,-50) 16(-250,50) 17(-150,-50) 18(-150,50) 19(-50,-50) 20(-50,50) 21(50,-50) 22(50,50) 23(150,-50) 24(150,50) 25(250,-50) 26(250,50) 27(350,-50) 28(350,50) 29(450,-50) 30(450,50) 31(550,-50) 32(550,50) 33(650,-50) 34(650,50) 35(750,-50) 36(750,50) 37(850,-50) 38(850,50) 39(950,-50) 40(950,50)
  silkscreen extent -1154,-167 1154,167, body extent -988,-88 988,88, height 236
JTAG-10 [mil]
  rect 68x68 hole 35: 1(0,0)
  round 68 hole 35: 2(0,100) 3(100,0) 4(100,100) 5(200,0) 6(200,100) 7(300,0) 8(300,100) 9(400,0) 10(400,100)
  silkscreen extent -200,-100 600,200
KEY735SO [mil]
  oval 140x55.12 smd: 1(0,0) 2(275,1)
  silkscreen extent 0,-67 276,71
KEY_DPDT [mil]
  round 75 hole 35: 1(0,0) 2(0,-100) 3(0,-200) 4(214.57,0) 5(214.57,-100) 6(214.57,-200)
  silkscreen extent -58,-268 277,68
LEDSO [mil]
  rect 60x50 smd: 1(90,0) 2(0,0)
  silkscreen extent -65,-40 140,40, body extent -34,-29 124,29, height 180
LEDso [mil]
  rect 60x50 smd: 1(90,0) 2(0,0)
  silkscreen extent -65,-40 140,40, body extent -68,-43 142,43, height 180
MINIUSBB [mm]
  rect 3x0.5 smd: 1(0,1.6) 2(0,0.8) 3(0,0) 4(0,-0.8) 5(0,-1.6)
  rect 2.5x2 smd: 6(-0.6,-4.45) 7(-6.1,-4.45) 8(-0.6,4.45) 9(-6.1,4.45)
  Keep-Out Layer circle w0.152: c-3.1,-2.2 r0.5
  Keep-Out Layer circle w0.152: c-3.1,2.2 r0.5
  silkscreen extent -9.05,-4.95 2,4.95
NIX_6 [mil]
  rect 60x60 hole 30: 1(0,0)
  round 60 hole 30: 2(100,0) 3(200,0) 4(300,0) 5(400,0) 6(500,0) 7(600,0) 8(600,400) 9(500,400) 10(400,400) 11(300,400) 12(200,400) 13(100,400) 14(0,400)
  silkscreen extent -606,-95 1206,495, body extent -608,-98 1208,498, height 315
QFN28 [mm]
  rect 2x2 smd: 0(2.75,-1.5)
  rect 1.2x0.27 smd: 1(0,0) 2(0,-0.5) 3(0,-1) 4(0,-1.5) 5(0,-2) 6(0,-2.5) 7(0,-3) 15(5.5,-3) 16(5.5,-2.5) 17(5.5,-2) 18(5.5,-1.5) 19(5.5,-1) 20(5.5,-0.5) 21(5.5,0)
  rect 0.27x1.2 smd: 8(1.25,-4.25) 9(1.75,-4.25) 10(2.25,-4.25) 11(2.75,-4.25) 12(3.25,-4.25) 13(3.75,-4.25) 14(4.25,-4.25) 22(4.25,1.25) 23(3.75,1.25) 24(3.25,1.25) 25(2.75,1.25) 26(2.25,1.25) 27(1.75,1.25) 28(1.25,1.25)
  silkscreen extent -0.1,-4 5.25,1.35
RN-8P [mm]
  rect 1x0.4 smd: 1(0,0) 2(0,-0.8) 3(0,-1.6) 4(0,-2.4) 5(1.858,-2.4) 6(1.858,-1.6) 7(1.858,-0.8) 8(1.858,0)
  silkscreen extent 0,-3.05 1.88,0.71
SIP2 [mil]
  rect 68x68 hole 35: 1(0,0)
  round 68 hole 35: 2(100,0)
  silkscreen extent -50,-50 150,50, body extent -38,-38 138,38, height 180
SO8 [mil]
  rect 60x24 smd: 1(0,0) 2(0,-50) 3(0,-100) 4(0,-150) 5(220,-150) 6(220,-100) 7(220,-50) 8(220,0)
  silkscreen extent 40,-175 180,25, body extent 38,-178 182,27, height 180
SOT23 [mil]
  rect 36x36 smd: 1(0,0) 2(75,0)
  rect 36x50 smd: 3(38,80)
  silkscreen extent -20,-5 95,85
SOT23-6 [mm]
  rect 0.5x1.27 smd: 1(0,0) 2(0.95,0) 3(1.905,0) 4(1.905,2.642) 5(0.95,2.642) 6(0,2.642)
  silkscreen extent -0.66,-0.99 2.51,3.61
SOT223 [mm]
  rect 1.2x2.2 smd: 1(0,0) 2(2.3,0) 3(4.6,0)
  rect 3.6x2.2 smd: 4(2.3,6.2)
  silkscreen extent -1.2,-1.7 5.8,7.9
TF [mm]
  rect 1.6x0.6 smd: 1(5.05,-2.25) 2(5.05,-1.15) 3(5.05,-0.05) 4(5.05,1.05) 5(5.05,2.15) 6(5.05,3.25) 7(5.05,4.35) 8(5.05,5.45) 9(5.05,6.55)
  rect 1.4x1.2 smd: 10(4.55,7.75)
  rect 2.2x1.2 smd: 11(-5.05,7.75) 12(-5.05,-7.75)
  rect 1.4x1.6 smd: 13(4.55,-6.85)
  Keep-Out Layer circle w0.127: c-5.45,-3.05 r0.5
  Keep-Out Layer circle w0.127: c-5.45,4.951 r0.5
  silkscreen extent -9.47,-7.15 4.01,7.29
TPS [mm]
  round 1.5 smd mask+0.5: 1(0,0)
TSOP-54 [mil]
  rect 17x75 smd: 1(0,0) 2(-31.5,0) 3(-62.99,0) 4(-94.49,0) 5(-125.98,0) 6(-157.48,0) 7(-188.98,0) 8(-220.47,0) 9(-251.97,0) 10(-283.46,0) 11(-314.99,0) 12(-346.46,0) 13(-377.95,0) 14(-409.45,0) 15(-440.94,0) 16(-472.44,0) 17(-503.94,0) 18(-535.43,0) 19(-566.93,0) 20(-598.43,0) 21(-629.92,0) 22(-661.42,0) 23(-692.91,0) 24(-724.41,0) 25(-755.91,0) 26(-787.4,0) 27(-818.9,0) 28(-818.9,-460) 29(-787.4,-460) 30(-755.91,-460) 31(-724.41,-460) 32(-692.91,-460) 33(-661.42,-460) 34(-630,-460) 35(-598.43,-460) 36(-566.93,-460) 37(-535.43,-460) 38(-503.94,-460) 39(-472.44,-460) 40(-440.94,-460) 41(-409.45,-460) 42(-377.95,-460) 43(-346.46,-460) 44(-314.99,-460) 45(-283.46,-460) 46(-251.97,-460) 47(-220.47,-460) 48(-188.98,-460) 49(-157.48,-460) 50(-125.98,-460) 51(-94.49,-460) 52(-62.99,-460) 53(-31.5,-460) 54(0,-460)
  silkscreen extent -852,-460 40,0
VGA [mil]
  rect 68x68 hole 35: 1(0,0)
  round 68 hole 35: 2(0,-90) 3(0,-180) 4(0,-270) 5(0,-360) 6(100,45) 7(100,-45) 8(100,-135) 9(100,-225) 10(100,-315) 11(200,0) 12(200,-90) 13(200,-180) 14(200,-270) 15(200,-360)
  round 220 hole 125: 16(100,-662) 17(100,322)
  silkscreen extent -100,-785 759,445

## Part data
C1 C2 C3 C5 C19 C46 C50: library part "CAP NP_Dup2"
C4 C6 C7 C8 C9 C10 C11 C12 C13 C14 C15 C16 C17 C18 C20 C21 C22 C23 C24 C25 C26 C27 C28 C37 C44 C45 C47 C48 C49: library part C_Dup4
C29 C30 C31 C32 C33 C34 C35: library part C_Dup2
C36: library part C_Dup3
C38 C39 C40 C41 C42 C43: library part C_Dup1
CB1: library part "Circuit Breaker", "Circuit Breaker"
D1 D2 D3 D4: library part BAV99
EC1 EC2 EC3 EC4 EC5 EC6: library part EC
F1: library part "Fuse 2"
J1 J2: library part MHDR2X20, "Header, 20-Pin, Dual row"
J3: library part JTAG-10_Dup1
J4: library part "Connector 15", "Receptacle Assembly, 15-Pin, Sim Line Connector"
J5: "Header, 9-Pin, Dual row"
J6: library part MiniUSBB
K1 K2 K3 K4: library part KEYB
L1: library part INDUCTOR
LED0 LED1 LED2 LED3 LED5 LED6: library part LED_Dup1
LED7 LED8: library part LED
LS1: library part SPEAKER
P1 P2 P3 P4: library part "Header 2", "Header, 2-Pin"
Q1 Q2 Q3 Q4 Q5 Q6 Q7: library part PNP
R1 R30 R31 R41 R42 R43 R45 R47 R52: library part R
R2 R3 R75: library part RESISTOR
R4 R5 R7 R9 R10 R11 R12 R14 R32 R33 R34: library part R_Dup3
R6 R8 R15 R35 R36 R37 R38 R39 R40 R44 R46: library part R_Dup2
R13: library part R_Dup1
R23 R24: library part R_Dup6
R25 R26 R27: library part R_Dup5
RN1 RN2 RN3 RN4 RN5 RN6 RN7 RN8 RN9 RN11 RN12 RN13 RN15 RN17 RN18 RN20 RN21 RN22 RN23 RN24 RN25 RN26 RN27 RN28 RN29 RN30 RN31 RN32 RN33: library part RN_Dup1
RN10 RN14 RN16 RN19 RN34: library part RN
SW1: library part "SW KEY-DPDT"
U3: "Cyclone IV Family FPGA, 2V Core, 179 I/O Pins, 2 PLLs, 256-Pin FBGA, Speed Grade 8, Commercial Grade"
U4: library part CP2102_0
U5 U6: library part 1117-3.3
U8: "16 Mb (x1) Automotive Serial NOR Flash Memory, 75 MHz, 2.7 to 3.6 V, 8-pin SO8 Narrow (MN), Tube"
U9: library part HY57651620/SO_0
U11: library part DS1302_8SO
U12: library part 24LC04B_0
X1: library part OSC
Y1: library part ZTA

## Free pads (board coordinates)
  round 6.35 hole 3.302: 0(4.064,4.064) 1(125.936,4.064) 2(125.936,86.055) 3(4.064,86.055)

## Via types
v1: diameter 0.508, hole 0.254, Top Layer to Bottom Layer, 377 vias
v2: diameter 0.762, hole 0.381, Top Layer to Bottom Layer, 41 vias
v3: diameter 1.016, hole 0.508, Top Layer to Bottom Layer, 2 vias

## Nets (pads, with @x,y where several pads share a name; then routed paths per layer and width w, separated by ;. In a path a pad name is that pad's centre, name@x,y a point inside that pad or via, vN(x,y) a via of type N, cw(c..) or ccw(c..) an arc to the next point about the centre after c; other vN are vias at no path point)
_A2: J2.6 RN1.6 | length 20
  Top Layer w0.127: RN1.6@118.012,61.443 119.075,61.443 122.961,65.329 125.747,65.329 ; RN1.6@118.409,61.346 cw(c118.642,61.113) 118.642,61.443 cw(c118.642,61.772) RN1.6@118.409,61.539 ; J2.6@126.226,64.088 ccw(c124.584,64.166) 125.747,65.329 ; J2.6@126.353,64.082 ccw(c124.972,64.148) 125.95,65.126 ccw(c126.927,66.104) J2.6@126.993,64.722 ; J2.6@126.48,64.076 ccw(c125.359,64.13) 126.153,64.923 ccw(c126.946,65.716) J2.6@126.999,64.595 ; J2.6@126.607,64.07 ccw(c125.747,64.111) 126.356,64.72 ccw(c126.964,65.329) J2.6@127.005,64.469 ; J2.6@126.987,64.849 cw(c126.909,66.491) 125.747,65.329 ; J2.6@127.025,64.05 125.747,65.329
_A3: J2.8 RN2.8 | length 21.3
  Top Layer w0.127: RN2.8@118.012,58.842 118.558,58.842 ; RN2.8@118.312,58.725 ccw(c118.312,59.034) 118.531,58.815 ; RN2.8@118.312,58.852 ccw(c118.312,59.467) 118.747,59.032 ; RN2.8@118.312,58.979 ccw(c118.312,59.901) 118.964,59.249 ; RN2.8@118.428,58.77 cw(c118.558,58.69) 118.558,58.842 ; RN2.8@118.428,58.914 ccw(c118.558,58.995) 118.558,58.842 ; J2.8@126.226,61.548 ccw(c124.584,61.626) 125.747,62.789 ; J2.8@126.353,61.542 ccw(c124.972,61.608) 125.95,62.586 ccw(c126.927,63.564) J2.8@126.993,62.182 ; J2.8@126.48,61.536 ccw(c125.359,61.59) 126.153,62.383 ccw(c126.946,63.176) J2.8@126.999,62.055 ; J2.8@126.607,61.53 ccw(c125.747,61.571) 126.356,62.18 ccw(c126.964,62.789) J2.8@127.005,61.929 ; J2.8@126.987,62.309 cw(c126.909,63.951) 125.747,62.789 ; J2.8@127.025,61.51 125.747,62.789 ; 118.558,58.842 122.504,62.789 125.747,62.789
_A4: J2.10 RN2.6 | length 19.3
  Top Layer w0.127: RN2.6@118.012,57.242 118.634,57.242 ; RN2.6@118.41,57.147 cw(c118.634,56.931) 118.634,57.242 ; RN2.6@118.41,57.337 ccw(c118.634,57.553) 118.634,57.242 ; J2.10@126.227,59.02 ccw(c124.667,59.118) 125.772,60.223 ; J2.10@126.354,59.012 ccw(c125.041,59.094) 125.971,60.024 ccw(c126.901,60.954) J2.10@126.983,59.642 ; J2.10@126.48,59.004 ccw(c125.415,59.071) 126.17,59.825 ccw(c126.924,60.58) J2.10@126.991,59.515 ; J2.10@126.607,58.996 ccw(c125.79,59.047) 126.369,59.627 ccw(c126.948,60.206) J2.10@126.999,59.388 ; J2.10@126.975,59.769 cw(c126.877,61.329) 125.772,60.223 ; J2.10@127.025,58.97 125.772,60.223 ; 118.634,57.242 121.615,60.223 125.772,60.223
_A5: J2.12 RN3.8 | length 19.9
  Top Layer w0.127: RN3.8@118.012,54.642 118.624,54.642 ; RN3.8@118.412,54.549 cw(c118.624,54.353) 118.624,54.642 ; RN3.8@118.412,54.734 ccw(c118.624,54.93) 118.624,54.642 ; J2.12@126.226,56.457 ccw(c124.501,56.514) 125.721,57.734 ; J2.12@126.353,56.452 ccw(c124.902,56.501) 125.928,57.527 ccw(c126.955,58.554) J2.12@127.003,57.103 ; J2.12@126.48,56.448 ccw(c125.302,56.487) 126.135,57.32 ccw(c126.968,58.153) J2.12@127.007,56.976 ; J2.12@126.607,56.444 ccw(c125.703,56.474) 126.342,57.113 ccw(c126.981,57.752) J2.12@127.011,56.849 ; J2.12@126.999,57.23 cw(c126.941,58.954) 125.721,57.734 ; J2.12@127.025,56.43 125.721,57.734 ; 118.624,54.642 121.717,57.734 125.721,57.734
_A6: J2.14 RN3.6 | length 20.7
  Top Layer w0.127: RN3.6@118.012,53.042 118.574,53.042 ; RN3.6@118.312,52.924 ccw(c118.312,53.272) 118.558,53.026 ; RN3.6@118.312,53.051 ccw(c118.312,53.706) 118.775,53.243 ; RN3.6@118.312,53.178 ccw(c118.312,54.139) 118.992,53.46 ; RN3.6@118.424,52.964 cw(c118.574,52.859) 118.574,53.042 ; RN3.6@118.424,53.12 ccw(c118.574,53.224) 118.574,53.042 ; J2.14@126.226,53.928 ccw(c124.584,54.006) 125.747,55.169 ; J2.14@126.353,53.922 ccw(c124.972,53.988) 125.95,54.966 ccw(c126.927,55.944) J2.14@126.993,54.562 ; J2.14@126.48,53.916 ccw(c125.359,53.97) 126.153,54.763 ccw(c126.946,55.556) J2.14@126.999,54.435 ; J2.14@126.607,53.91 ccw(c125.747,53.951) 126.356,54.56 ccw(c126.964,55.169) J2.14@127.005,54.309 ; J2.14@126.987,54.689 cw(c126.909,56.331) 125.747,55.169 ; J2.14@127.025,53.89 125.747,55.169 ; 118.574,53.042 120.701,55.169 125.747,55.169
_A7: J2.16 RN4.8 | length 19.4
  Top Layer w0.127: RN4.8@118.012,50.441 118.412,50.441 120.599,52.629 125.747,52.629 ; RN4.8@118.312,50.451 ccw(c118.312,50.714) RN4.8@118.498,50.528 ; RN4.8@118.312,50.578 ccw(c118.312,51.147) 118.715,50.745 ; J2.16@126.226,51.388 ccw(c124.584,51.466) 125.747,52.629 ; J2.16@126.353,51.382 ccw(c124.972,51.448) 125.95,52.426 ccw(c126.927,53.404) J2.16@126.993,52.022 ; J2.16@126.48,51.376 ccw(c125.359,51.43) 126.153,52.223 ccw(c126.946,53.016) J2.16@126.999,51.895 ; J2.16@126.607,51.37 ccw(c125.747,51.411) 126.356,52.02 ccw(c126.964,52.629) J2.16@127.005,51.769 ; J2.16@126.987,52.149 cw(c126.909,53.791) 125.747,52.629 ; J2.16@127.025,51.35 125.747,52.629
_A8: J2.18 RN4.6 | length 19.3
  Top Layer w0.127: RN4.6@118.012,48.841 118.463,48.841 119.71,50.089 125.747,50.089 ; RN4.6@118.312,48.851 ccw(c118.312,49.237) 118.585,48.964 ; RN4.6@118.312,48.978 ccw(c118.312,49.67) 118.802,49.181 ; J2.18@126.226,48.848 ccw(c124.584,48.926) 125.747,50.089 ; J2.18@126.353,48.842 ccw(c124.972,48.908) 125.95,49.886 ccw(c126.927,50.864) J2.18@126.993,49.482 ; J2.18@126.48,48.836 ccw(c125.359,48.89) 126.153,49.683 ccw(c126.946,50.476) J2.18@126.999,49.355 ; J2.18@126.607,48.83 ccw(c125.747,48.871) 126.356,49.48 ccw(c126.964,50.089) J2.18@127.005,49.229 ; J2.18@126.987,49.609 cw(c126.909,51.251) 125.747,50.089 ; J2.18@127.025,48.81 125.747,50.089
_A9: J2.20 RN5.8 | length 19.7
  Top Layer w0.127: RN5.8@118.012,46.241 118.504,46.241 119.837,47.574 125.721,47.574 ; RN5.8@118.312,46.25 ccw(c118.312,46.735) 118.655,46.392 ; RN5.8@118.312,46.377 ccw(c118.312,47.169) 118.872,46.609 ; J2.20@126.226,46.297 ccw(c124.501,46.354) 125.721,47.574 ; J2.20@126.353,46.292 ccw(c124.902,46.341) 125.928,47.367 ccw(c126.955,48.394) J2.20@127.003,46.943 ; J2.20@126.48,46.288 ccw(c125.302,46.327) 126.135,47.16 ccw(c126.968,47.993) J2.20@127.007,46.816 ; J2.20@126.607,46.284 ccw(c125.703,46.314) 126.342,46.953 ccw(c126.981,47.592) J2.20@127.011,46.689 ; J2.20@126.999,47.07 cw(c126.941,48.794) 125.721,47.574 ; J2.20@127.025,46.27 125.721,47.574
_A10: J2.22 RN5.6 | length 17.4
  Top Layer w0.127: RN5.6@118.012,44.641 123.279,44.641 123.546,44.907 125.848,44.907 ; RN5.6@118.409,44.544 cw(c118.642,44.311) 118.642,44.641 cw(c118.642,44.97) RN5.6@118.409,44.737 ; J2.22@126.23,43.818 ccw(c124.906,43.965) 125.848,44.907 ; J2.22@126.356,43.804 ccw(c125.243,43.928) 126.035,44.72 ccw(c126.827,45.513) J2.22@126.951,44.399 ; J2.22@126.483,43.79 ccw(c125.579,43.891) 126.222,44.533 ccw(c126.865,45.176) J2.22@126.965,44.273 ; J2.22@126.609,43.776 ccw(c125.915,43.853) 126.409,44.347 ccw(c126.902,44.84) J2.22@126.979,44.147 ; J2.22@126.937,44.525 cw(c126.79,45.849) 125.848,44.907 ; J2.22@127.025,43.73 125.848,44.907
_A11: J2.24 RN6.8 | length 18
  Top Layer w0.127: RN6.8@118.012,42.04 123.041,42.04 123.419,42.418 125.797,42.418 ; RN6.8@118.409,41.944 cw(c118.642,41.711) 118.642,42.04 cw(c118.642,42.37) RN6.8@118.409,42.137 ; J2.24@126.228,41.252 ccw(c124.748,41.368) 125.797,42.418 ; J2.24@126.354,41.243 ccw(c125.109,41.34) 125.992,42.223 ccw(c126.875,43.106) J2.24@126.973,41.861 ; J2.24@126.481,41.233 ccw(c125.471,41.312) 126.187,42.028 ccw(c126.904,42.745) J2.24@126.983,41.734 ; J2.24@126.608,41.223 ccw(c125.832,41.283) 126.382,41.833 ccw(c126.932,42.383) J2.24@126.993,41.608 ; J2.24@126.963,41.988 cw(c126.847,43.468) 125.797,42.418 ; J2.24@127.025,41.19 125.797,42.418
_A12: J2.26 RN6.6 | length 18.9
  Top Layer w0.127: RN6.6@118.012,40.44 118.386,40.44 118.872,39.954 125.721,39.954 ; RN6.6@118.312,40.304 cw(c118.312,39.796) 118.671,40.155 ; RN6.6@118.449,40.44 ccw(c118.6,40.44) RN6.6@118.493,40.333 ; J2.26@126.226,38.677 ccw(c124.501,38.734) 125.721,39.954 ; J2.26@126.353,38.672 ccw(c124.902,38.721) 125.928,39.747 ccw(c126.955,40.774) J2.26@127.003,39.323 ; J2.26@126.48,38.668 ccw(c125.302,38.707) 126.135,39.54 ccw(c126.968,40.373) J2.26@127.007,39.196 ; J2.26@126.607,38.664 ccw(c125.703,38.694) 126.342,39.333 ccw(c126.981,39.972) J2.26@127.011,39.069 ; J2.26@126.999,39.45 cw(c126.941,41.174) 125.721,39.954 ; J2.26@127.025,38.65 125.721,39.954
_A13: J2.28 RN7.8 | length 18.9
  Top Layer w0.127: RN7.8@118.012,37.84 119.336,37.84 119.761,37.414 125.721,37.414 ; RN7.8@118.409,37.743 cw(c118.642,37.51) 118.642,37.84 cw(c118.642,38.169) RN7.8@118.409,37.936 ; J2.28@126.226,36.137 ccw(c124.501,36.194) 125.721,37.414 ; J2.28@126.353,36.132 ccw(c124.902,36.181) 125.928,37.207 ccw(c126.955,38.234) J2.28@127.003,36.783 ; J2.28@126.48,36.128 ccw(c125.302,36.167) 126.135,37 ccw(c126.968,37.833) J2.28@127.007,36.656 ; J2.28@126.607,36.124 ccw(c125.703,36.154) 126.342,36.793 ccw(c126.981,37.432) J2.28@127.011,36.529 ; J2.28@126.999,36.91 cw(c126.941,38.634) 125.721,37.414 ; J2.28@127.025,36.11 125.721,37.414
_B1: J2.3 RN1.7 | length 12.3
  Top Layer w0.127: RN1.7@118.012,62.243 118.859,62.243 123.207,66.59 ; RN1.7@118.409,62.146 cw(c118.642,61.913) 118.642,62.243 cw(c118.642,62.572) RN1.7@118.409,62.339 ; J2.3@123.766,66.24 ccw(c123.207,65.968) 123.207,66.59 ; J2.3@123.766,66.94 cw(c123.207,67.212) 123.207,66.59 ; J2.3@123.88,66.296 ccw(c123.41,66.067) 123.41,66.59 ccw(c123.41,67.113) J2.3@123.88,66.884 ; J2.3@123.994,66.351 ccw(c123.613,66.166) 123.613,66.59 ccw(c123.613,67.014) J2.3@123.994,66.829 ; J2.3@124.485,66.59 123.207,66.59
_B3: J2.5 RN1.5 | length 15.6
  Top Layer w0.127: RN1.5@118.012,60.643 119.418,60.643 122.826,64.05 ; RN1.5@118.409,60.546 cw(c118.642,60.313) 118.642,60.643 cw(c118.642,60.972) RN1.5@118.409,60.739 ; J2.5@123.859,63.552 ccw(c122.826,62.729) 122.826,64.05 ; J2.5@123.859,64.548 cw(c122.826,65.371) 122.826,64.05 ; J2.5@123.959,63.631 ccw(c123.089,62.938) 123.089,64.05 ccw(c123.089,65.162) J2.5@123.959,64.469 ; J2.5@124.058,63.71 ccw(c123.353,63.148) 123.353,64.05 ccw(c123.353,64.952) J2.5@124.058,64.39 ; J2.5@124.158,63.789 ccw(c123.616,63.358) 123.616,64.05 ccw(c123.616,64.742) J2.5@124.158,64.311 ; J2.5@124.485,64.05 122.826,64.05
_B4: J2.7 RN2.7 | length 19
  Top Layer w0.127: RN2.7@118.012,58.042 118.57,58.042 ; RN2.7@118.312,57.925 ccw(c118.312,58.265) 118.553,58.024 ; RN2.7@118.312,58.052 ccw(c118.312,58.698) 118.769,58.241 ; RN2.7@118.312,58.179 ccw(c118.312,59.132) 118.986,58.458 ; RN2.7@118.425,57.965 cw(c118.57,57.866) 118.57,58.042 ; RN2.7@118.425,58.119 ccw(c118.57,58.218) 118.57,58.042 ; J2.7@123.92,60.944 ccw(c122.554,59.578) 122.554,61.51 ccw(c122.554,63.442) J2.7@123.92,62.076 ; J2.7@124.009,61.034 ccw(c122.86,59.885) 122.86,61.51 ccw(c122.86,63.135) J2.7@124.009,61.986 ; J2.7@124.099,61.124 ccw(c123.167,60.192) 123.167,61.51 ccw(c123.167,62.828) J2.7@124.099,61.896 ; J2.7@124.189,61.214 ccw(c123.474,60.498) 123.474,61.51 ccw(c123.474,62.522) J2.7@124.189,61.806 ; J2.7@124.485,61.51 122.038,61.51 118.57,58.042
_B5: J2.9 RN2.5 | length 17.2
  Top Layer w0.127: RN2.5@118.012,56.442 118.596,56.442 ; RN2.5@118.419,56.357 cw(c118.596,56.215) 118.596,56.442 ; RN2.5@118.419,56.528 ccw(c118.596,56.669) 118.596,56.442 ; J2.9@123.92,58.404 ccw(c122.554,57.038) 122.554,58.97 ccw(c122.554,60.902) J2.9@123.92,59.536 ; J2.9@124.009,58.494 ccw(c122.86,57.345) 122.86,58.97 ccw(c122.86,60.595) J2.9@124.009,59.446 ; J2.9@124.099,58.584 ccw(c123.167,57.652) 123.167,58.97 ccw(c123.167,60.288) J2.9@124.099,59.356 ; J2.9@124.189,58.674 ccw(c123.474,57.958) 123.474,58.97 ccw(c123.474,59.982) J2.9@124.189,59.266 ; J2.9@124.485,58.97 121.124,58.97 118.596,56.442
_B6: J2.11 RN3.7 | length 18.2
  Top Layer w0.127: RN3.7@118.012,53.842 118.536,53.842 ; RN3.7@118.312,53.851 ccw(c118.312,54.413) 118.71,54.016 ; RN3.7@118.312,53.978 ccw(c118.312,54.847) 118.926,54.233 ; RN3.7@118.434,53.779 cw(c118.536,53.727) 118.536,53.842 ; RN3.7@118.434,53.904 ccw(c118.536,53.956) 118.536,53.842 ; J2.11@123.92,55.864 ccw(c122.554,54.498) 122.554,56.43 ccw(c122.554,58.362) J2.11@123.92,56.996 ; J2.11@124.009,55.954 ccw(c122.86,54.805) 122.86,56.43 ccw(c122.86,58.055) J2.11@124.009,56.906 ; J2.11@124.099,56.044 ccw(c123.167,55.112) 123.167,56.43 ccw(c123.167,57.748) J2.11@124.099,56.816 ; J2.11@124.189,56.134 ccw(c123.474,55.418) 123.474,56.43 ccw(c123.474,57.442) J2.11@124.189,56.726 ; J2.11@124.485,56.43 121.124,56.43 118.536,53.842
_B7: J2.13 RN3.5 | length 17.4
  Top Layer w0.127: RN3.5@118.012,52.242 118.51,52.242 120.159,53.89 J2.13@124.485,53.89 ; RN3.5@118.312,52.251 ccw(c118.312,52.753) 118.667,52.398 ; RN3.5@118.312,52.378 ccw(c118.312,53.186) 118.883,52.615 ; J2.13@123.92,53.324 ccw(c122.554,51.958) 122.554,53.89 ccw(c122.554,55.822) J2.13@123.92,54.456 ; J2.13@124.009,53.414 ccw(c122.86,52.265) 122.86,53.89 ccw(c122.86,55.515) J2.13@124.009,54.366 ; J2.13@124.099,53.504 ccw(c123.167,52.572) 123.167,53.89 ccw(c123.167,55.208) J2.13@124.099,54.276 ; J2.13@124.189,53.594 ccw(c123.474,52.878) 123.474,53.89 ccw(c123.474,54.902) J2.13@124.189,54.186
_B8: J2.15 RN4.7 | length 17.3
  Top Layer w0.127: RN4.7@118.012,49.641 118.475,49.641 120.167,51.333 J2.15@124.469,51.333 ; RN4.7@118.312,49.651 ccw(c118.312,50.067) 118.607,49.773 ; RN4.7@118.312,49.778 ccw(c118.312,50.501) 118.824,49.99 ; 122.514,51.333 ccw(c122.514,53.322) J2.15@123.92,51.916 ; 122.594,51.333 cw(c122.594,49.458) J2.15@123.92,50.784 ; 122.82,51.333 ccw(c122.82,53.015) J2.15@124.009,51.826 ; 122.9,51.333 cw(c122.9,49.765) J2.15@124.009,50.874 ; 123.127,51.333 ccw(c123.127,52.708) J2.15@124.099,51.736 ; 123.207,51.333 cw(c123.207,50.072) J2.15@124.099,50.964 ; 123.434,51.333 ccw(c123.434,52.402) J2.15@124.189,51.646 ; 123.514,51.333 cw(c123.514,50.378) J2.15@124.189,51.054
_B9: J2.17 RN4.5 | length 16.5
  Top Layer w0.127: RN4.5@118.012,48.041 118.602,48.041 ; RN4.5@118.417,47.954 cw(c118.602,47.801) 118.602,48.041 ; RN4.5@118.417,48.128 ccw(c118.602,48.281) 118.602,48.041 ; J2.17@123.92,48.244 ccw(c122.554,46.878) 122.554,48.81 ccw(c122.554,50.742) J2.17@123.92,49.376 ; J2.17@124.009,48.334 ccw(c122.86,47.185) 122.86,48.81 ccw(c122.86,50.435) J2.17@124.009,49.286 ; J2.17@124.099,48.424 ccw(c123.167,47.492) 123.167,48.81 ccw(c123.167,50.128) J2.17@124.099,49.196 ; J2.17@124.189,48.514 ccw(c123.474,47.798) 123.474,48.81 ccw(c123.474,49.822) J2.17@124.189,49.106 ; J2.17@124.485,48.81 119.371,48.81 118.602,48.041
_B10: J2.19 RN5.7 | length 16.7
  Top Layer w0.127: RN5.7@118.012,45.441 118.415,45.441 119.244,46.27 J2.19@124.485,46.27 ; RN5.7@118.312,45.45 ccw(c118.312,45.721) RN5.7@118.504,45.53 ; RN5.7@118.312,45.577 ccw(c118.312,46.155) 118.721,45.746 ; J2.19@123.92,45.704 ccw(c122.554,44.338) 122.554,46.27 ccw(c122.554,48.202) J2.19@123.92,46.836 ; J2.19@124.009,45.794 ccw(c122.86,44.645) 122.86,46.27 ccw(c122.86,47.895) J2.19@124.009,46.746 ; J2.19@124.099,45.884 ccw(c123.167,44.952) 123.167,46.27 ccw(c123.167,47.588) J2.19@124.099,46.656 ; J2.19@124.189,45.974 ccw(c123.474,45.258) 123.474,46.27 ccw(c123.474,47.282) J2.19@124.189,46.566
_B11: J2.21 RN5.5 | length 16.5
  Top Layer w0.127: RN5.5@118.012,43.841 J2.21@124.375,43.841 ; RN5.5@118.409,43.744 cw(c118.642,43.511) 118.642,43.841 cw(c118.642,44.17) RN5.5@118.409,43.937 ; 122.287,43.841 cw(c122.287,41.531) J2.21@123.92,43.164 ; 122.593,43.841 cw(c122.593,41.838) J2.21@124.009,43.254 ; 122.821,43.841 ccw(c122.821,45.394) J2.21@123.92,44.296 ; 122.9,43.841 cw(c122.9,42.144) J2.21@124.099,43.344 ; 123.128,43.841 ccw(c123.128,45.088) J2.21@124.009,44.206 ; 123.206,43.841 cw(c123.206,42.451) J2.21@124.189,43.434 ; 123.434,43.841 ccw(c123.434,44.781) J2.21@124.099,44.116 ; 123.513,43.841 cw(c123.513,42.758) J2.21@124.279,43.523
_B12: J2.23 RN6.7 | length 16.2
  Top Layer w0.127: RN6.7@118.012,41.24 J2.23@124.435,41.24 ; RN6.7@118.409,41.144 cw(c118.642,40.911) 118.642,41.24 cw(c118.642,41.57) RN6.7@118.409,41.337 ; 122.433,41.24 cw(c122.433,39.137) J2.23@123.92,40.624 ; 122.675,41.24 ccw(c122.675,43) J2.23@123.92,41.756 ; 122.739,41.24 cw(c122.739,39.444) J2.23@124.009,40.714 ; 122.982,41.24 ccw(c122.982,42.694) J2.23@124.009,41.666 ; 123.046,41.24 cw(c123.046,39.75) J2.23@124.099,40.804 ; 123.288,41.24 ccw(c123.288,42.387) J2.23@124.099,41.576 ; 123.352,41.24 cw(c123.352,40.057) J2.23@124.189,40.894 ; 123.595,41.24 ccw(c123.595,42.081) J2.23@124.189,41.486
_B13: J2.25 RN6.5 | length 16.6
  Top Layer w0.127: RN6.5@118.012,39.64 118.348,39.64 119.338,38.65 J2.25@124.485,38.65 ; RN6.5@118.312,39.504 cw(c118.312,39.088) 118.606,39.382 ; RN6.5@118.449,39.64 ccw(c118.692,39.64) 118.52,39.468 ; J2.25@123.92,38.084 ccw(c122.554,36.718) 122.554,38.65 ccw(c122.554,40.582) J2.25@123.92,39.216 ; J2.25@124.009,38.174 ccw(c122.86,37.025) 122.86,38.65 ccw(c122.86,40.275) J2.25@124.009,39.126 ; J2.25@124.099,38.264 ccw(c123.167,37.332) 123.167,38.65 ccw(c123.167,39.968) J2.25@124.099,39.036 ; J2.25@124.189,38.354 ccw(c123.474,37.638) 123.474,38.65 ccw(c123.474,39.662) J2.25@124.189,38.946
_C2: J2.4 RN1.8 | length 19.4
  Top Layer w0.127: RN1.8@118.012,63.043 118.593,63.043 ; RN1.8@118.42,62.959 cw(c118.593,62.823) 118.593,63.043 ; RN1.8@118.42,63.127 ccw(c118.593,63.262) 118.593,63.043 ; J2.4@126.229,66.665 ccw(c124.828,66.797) 125.823,67.793 ; J2.4@126.355,66.653 ccw(c125.177,66.764) 126.014,67.602 ccw(c126.851,68.439) J2.4@126.962,67.26 ; J2.4@126.482,66.641 ccw(c125.525,66.732) 126.205,67.411 ccw(c126.884,68.09) J2.4@126.974,67.134 ; J2.4@126.608,66.629 ccw(c125.874,66.699) 126.396,67.22 ccw(c126.917,67.741) J2.4@126.986,67.007 ; J2.4@126.95,67.387 cw(c126.818,68.788) 125.823,67.793 ; J2.4@127.025,66.59 125.823,67.793 ; 118.593,63.043 123.342,67.793 125.823,67.793
_C6: J2.29 RN7.5 | length 17
  Top Layer w0.127: RN7.5@118.012,35.44 118.84,35.44 120.71,33.57 J2.29@124.485,33.57 ; RN7.5@118.409,35.343 cw(c118.642,35.11) 118.642,35.44 cw(c118.642,35.769) RN7.5@118.409,35.536 ; J2.29@123.92,33.004 ccw(c122.554,31.638) 122.554,33.57 ccw(c122.554,35.502) J2.29@123.92,34.136 ; J2.29@124.009,33.094 ccw(c122.86,31.945) 122.86,33.57 ccw(c122.86,35.195) J2.29@124.009,34.046 ; J2.29@124.099,33.184 ccw(c123.167,32.252) 123.167,33.57 ccw(c123.167,34.888) J2.29@124.099,33.956 ; J2.29@124.189,33.274 ccw(c123.474,32.558) 123.474,33.57 ccw(c123.474,34.582) J2.29@124.189,33.866
_C8: J2.34 RN8.6 | length 19.9
  Top Layer w0.127: RN8.6@118.012,32.039 118.634,32.039 ; RN8.6@118.41,31.944 cw(c118.634,31.729) 118.634,32.039 ; RN8.6@118.41,32.134 ccw(c118.634,32.349) 118.634,32.039 ; J2.34@126.225,28.505 ccw(c124.416,28.54) 125.696,29.82 ; J2.34@126.352,28.503 ccw(c124.831,28.532) 125.907,29.609 ccw(c126.983,30.685) J2.34@127.012,29.163 ; J2.34@126.479,28.501 ccw(c125.245,28.524) 126.118,29.397 ccw(c126.991,30.271) J2.34@127.015,29.036 ; J2.34@126.606,28.498 ccw(c125.659,28.516) 126.329,29.186 ccw(c126.999,29.857) J2.34@127.017,28.909 ; J2.34@127.01,29.29 cw(c126.975,31.099) 125.696,29.82 ; J2.34@127.025,28.49 125.696,29.82 ; 118.634,32.039 120.853,29.82 125.696,29.82
_D5: J2.27 RN7.7 | length 16.6
  Top Layer w0.127: RN7.7@118.012,37.04 119.272,37.04 120.202,36.11 J2.27@124.485,36.11 ; RN7.7@118.409,36.943 cw(c118.642,36.71) 118.642,37.04 cw(c118.642,37.369) RN7.7@118.409,37.136 ; J2.27@123.92,35.544 ccw(c122.554,34.178) 122.554,36.11 ccw(c122.554,38.042) J2.27@123.92,36.676 ; J2.27@124.009,35.634 ccw(c122.86,34.485) 122.86,36.11 ccw(c122.86,37.735) J2.27@124.009,36.586 ; J2.27@124.099,35.724 ccw(c123.167,34.792) 123.167,36.11 ccw(c123.167,37.428) J2.27@124.099,36.496 ; J2.27@124.189,35.814 ccw(c123.474,35.098) 123.474,36.11 ccw(c123.474,37.122) J2.27@124.189,36.406
_D6: J2.30 RN7.6 | length 19
  Top Layer w0.127: RN7.6@118.012,36.24 119.158,36.24 120.548,34.849 125.747,34.849 ; RN7.6@118.409,36.143 cw(c118.642,35.91) 118.642,36.24 cw(c118.642,36.569) RN7.6@118.409,36.336 ; J2.30@126.226,33.608 ccw(c124.584,33.686) 125.747,34.849 ; J2.30@126.353,33.602 ccw(c124.972,33.668) 125.95,34.646 ccw(c126.927,35.624) J2.30@126.993,34.242 ; J2.30@126.48,33.596 ccw(c125.359,33.65) 126.153,34.443 ccw(c126.946,35.236) J2.30@126.999,34.115 ; J2.30@126.607,33.59 ccw(c125.747,33.631) 126.356,34.24 ccw(c126.964,34.849) J2.30@127.005,33.989 ; J2.30@126.987,34.369 cw(c126.909,36.011) 125.747,34.849 ; J2.30@127.025,33.57 125.747,34.849